# Altium PCB PX4FMUv2.4.6.PcbDoc (part 1 of 3)
Units mil, origin at the board's own origin, x right, y up, seen from the top; angles counter-clockwise.
Board outline 2756 x 1595 mil, 6 copper layers (Top, Ground, Horizontal, Vertical, Power, Bottom), stack 65.355 mil thick; 292 components, 264 nets, 1164 pads, 473 vias.
Unrouted connection lines stored in the file: 12.
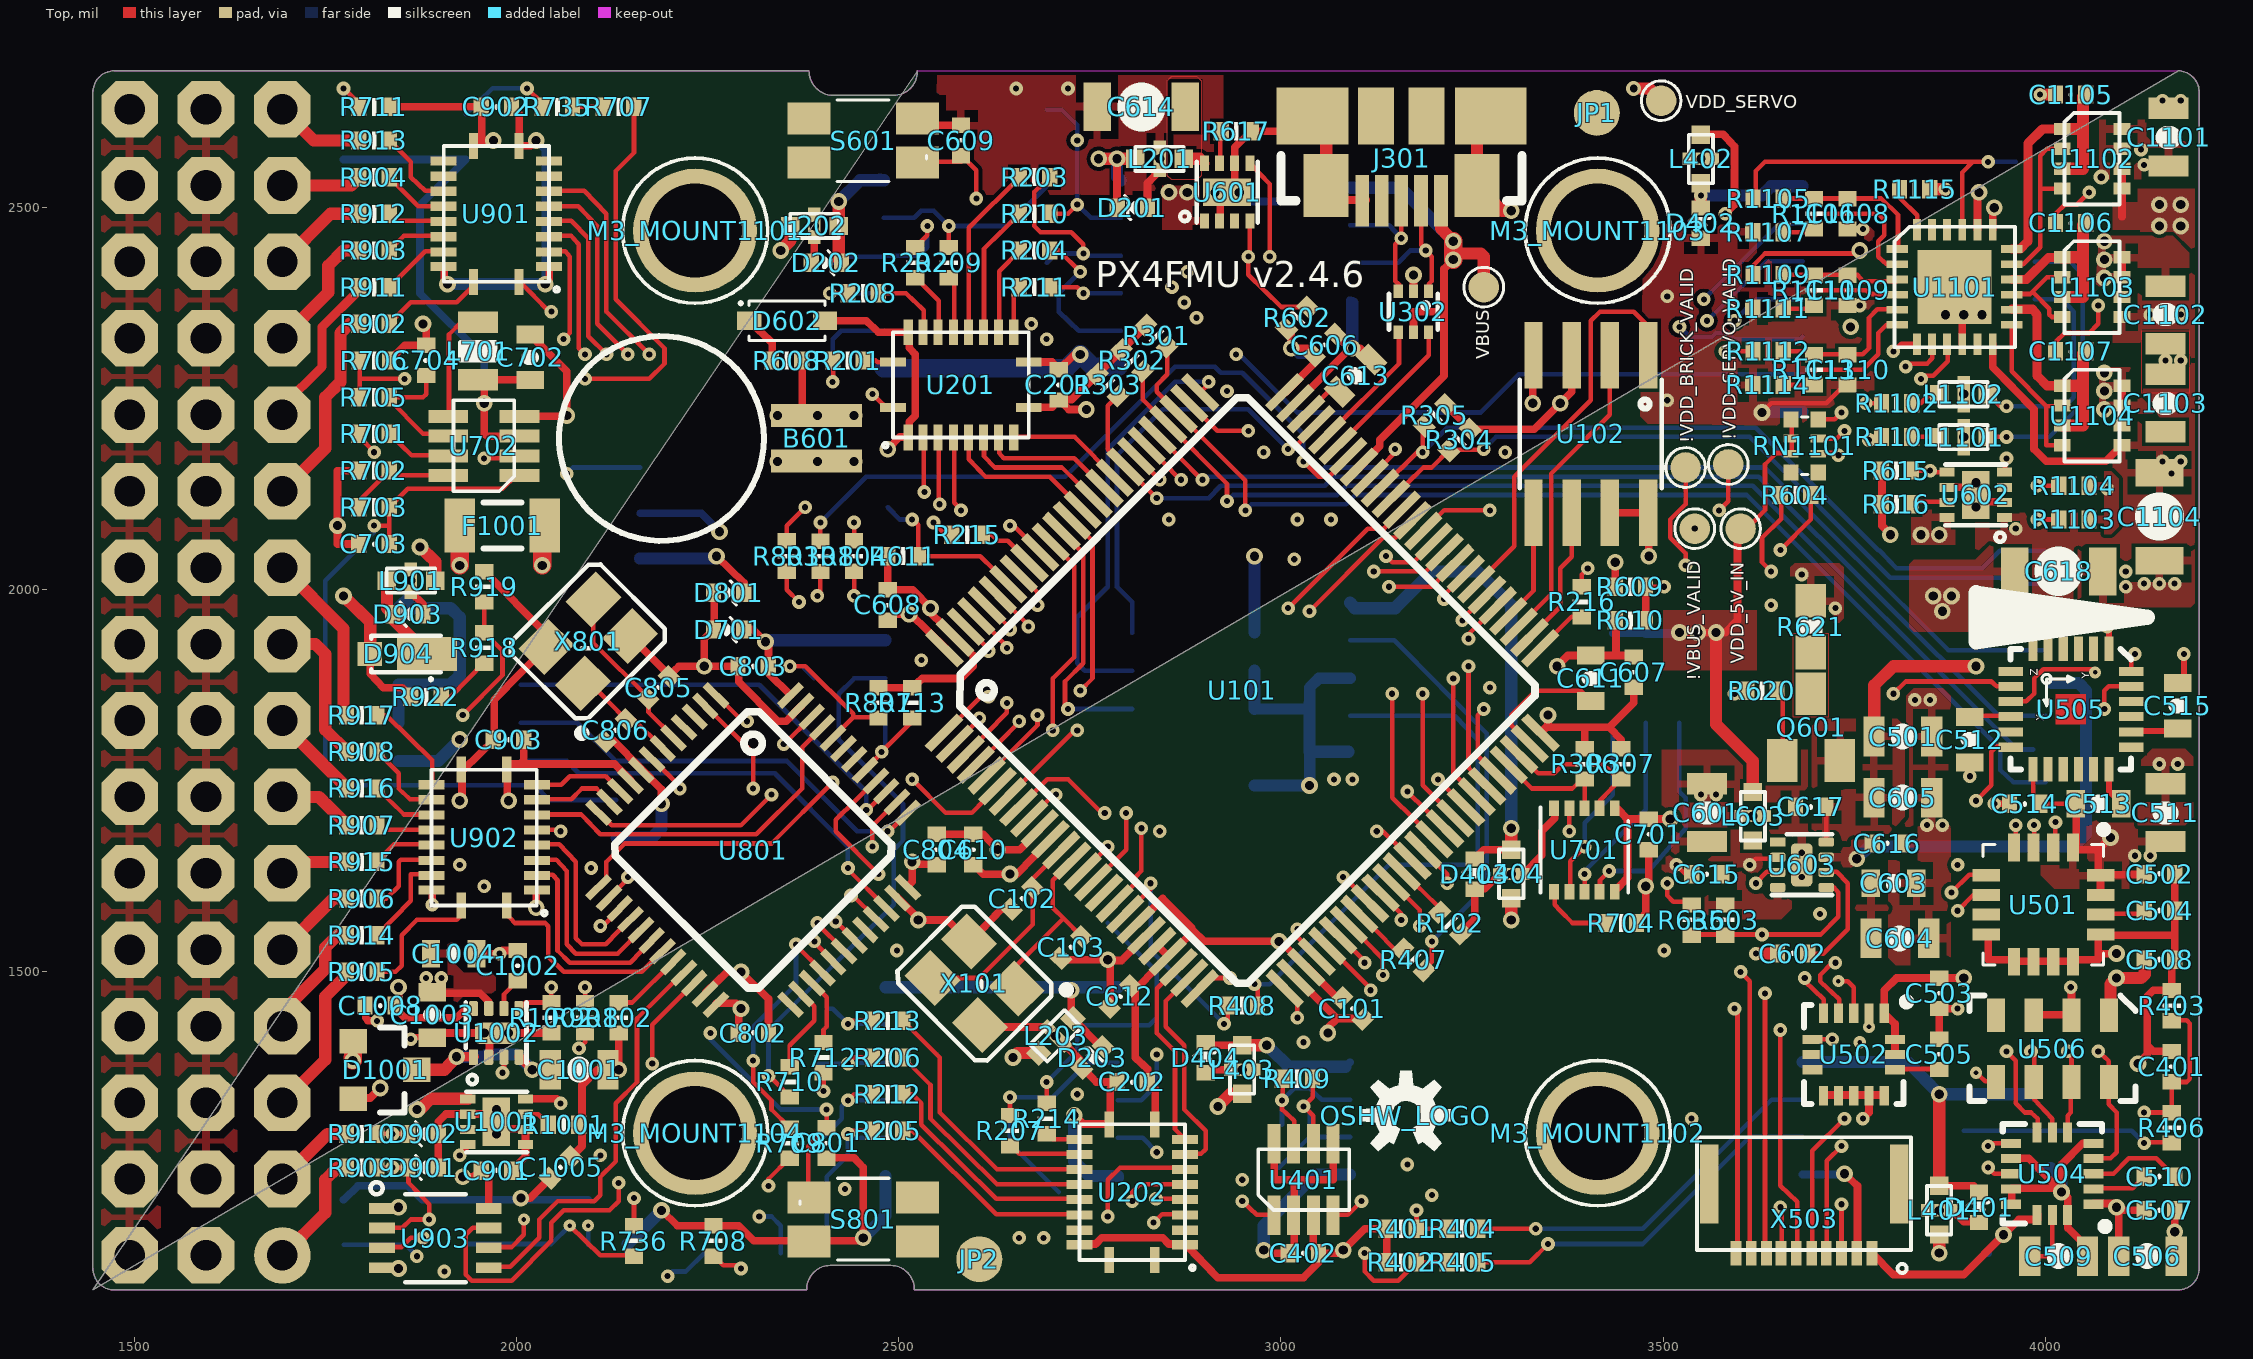
[diagram p0: Top view]
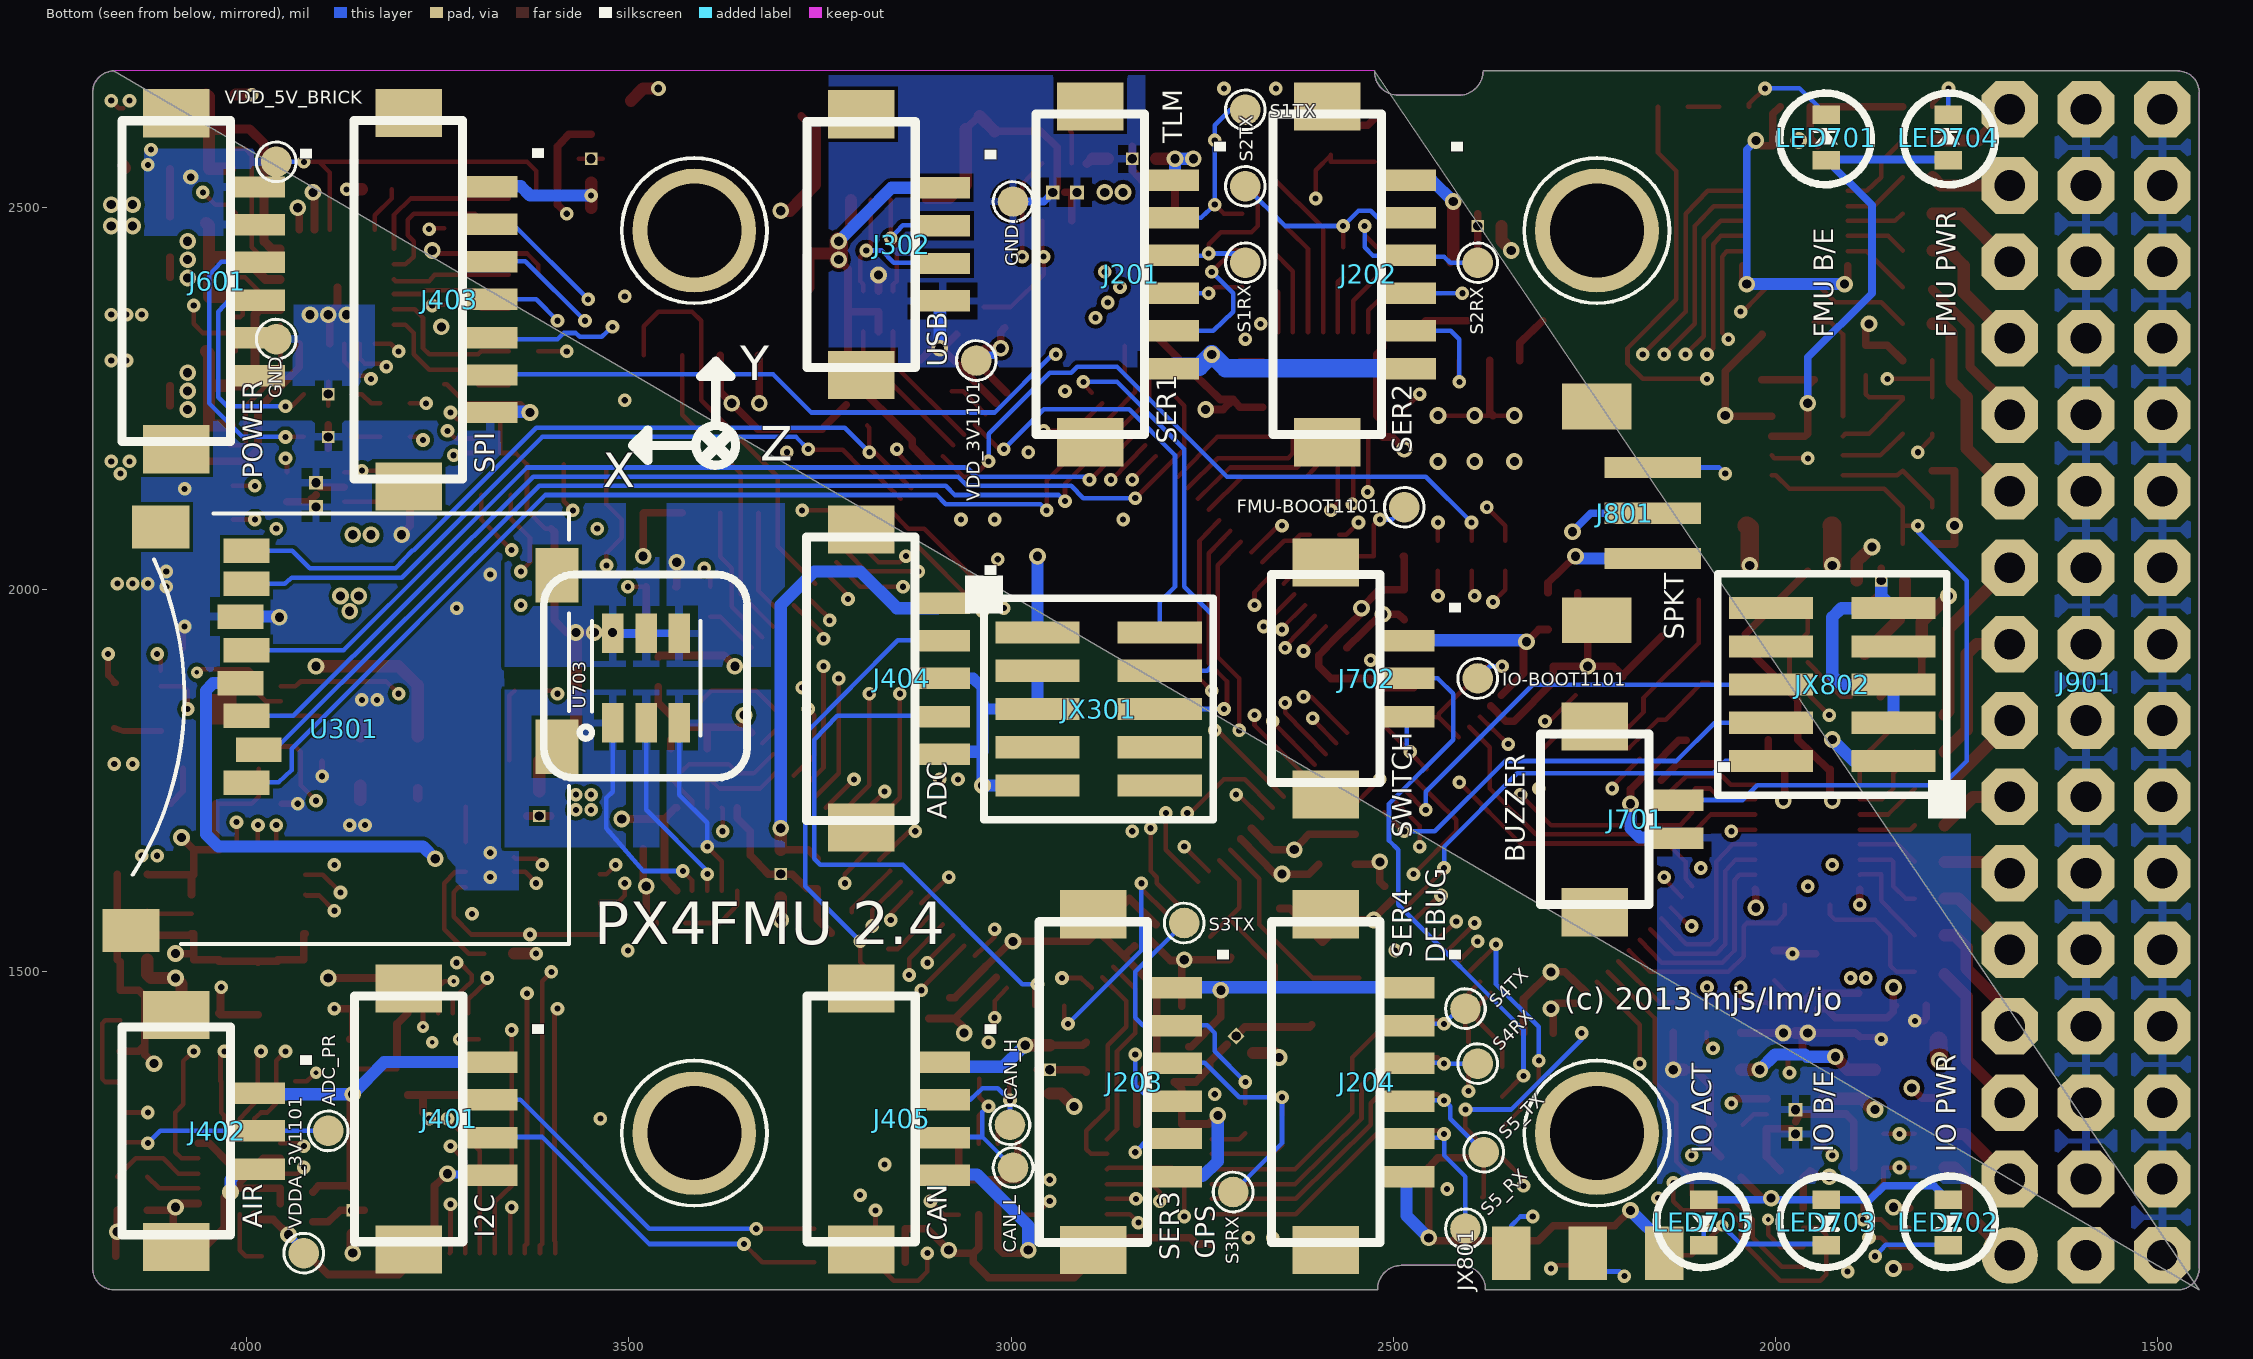
[diagram p1: Bottom view, seen from below]
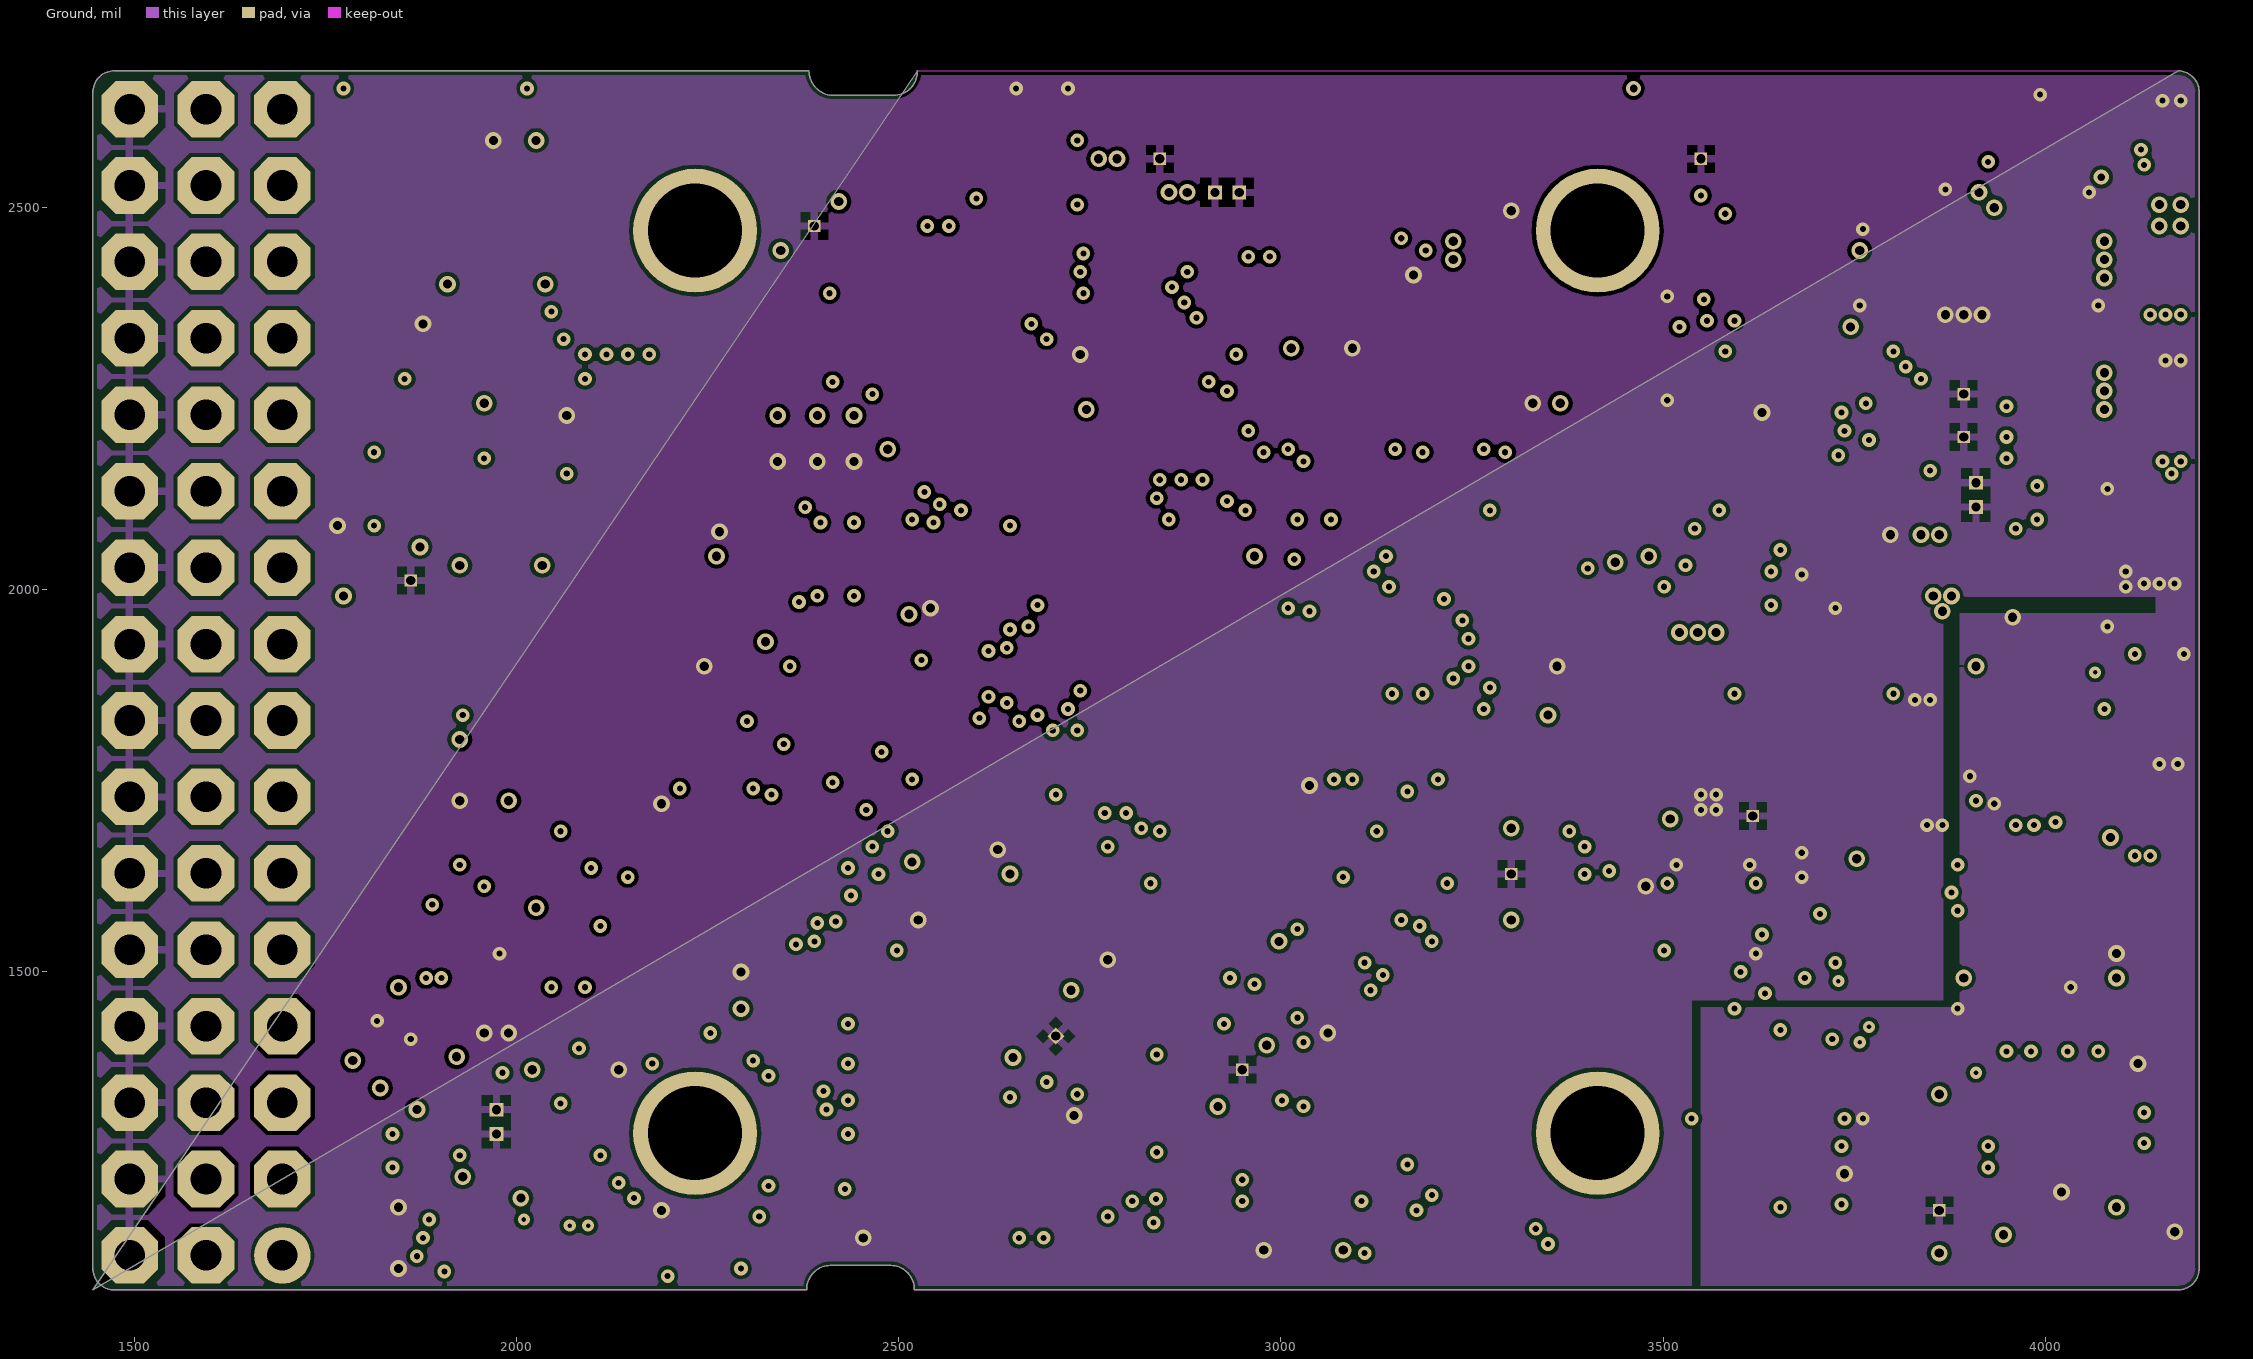
[diagram p2: Ground]
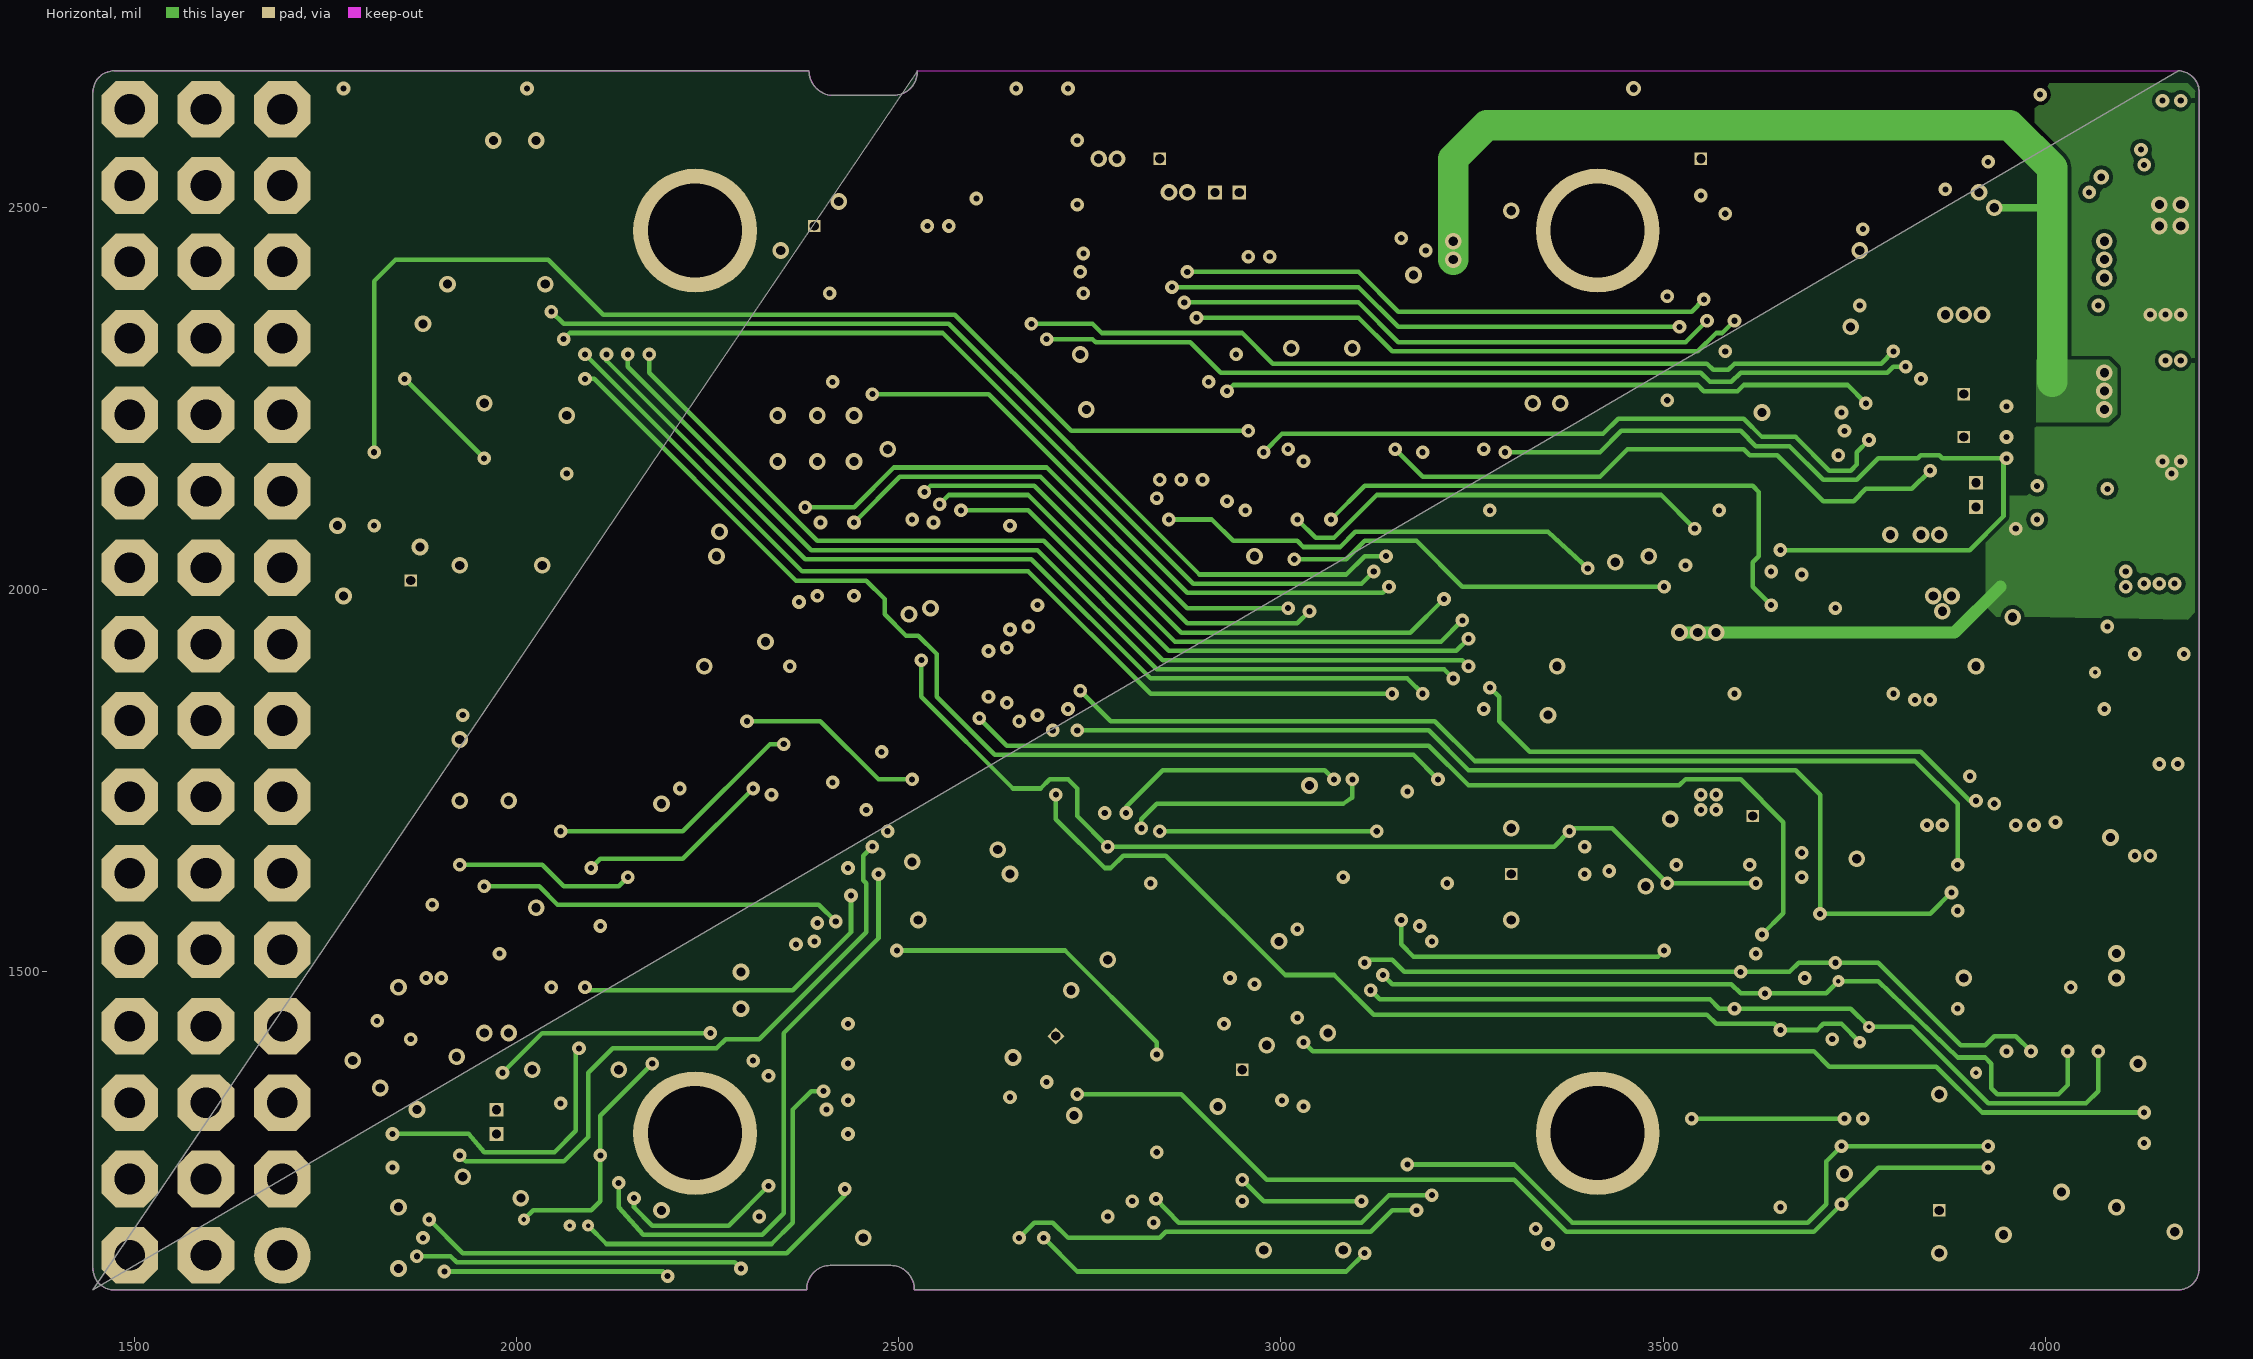
[diagram p3: Horizontal]
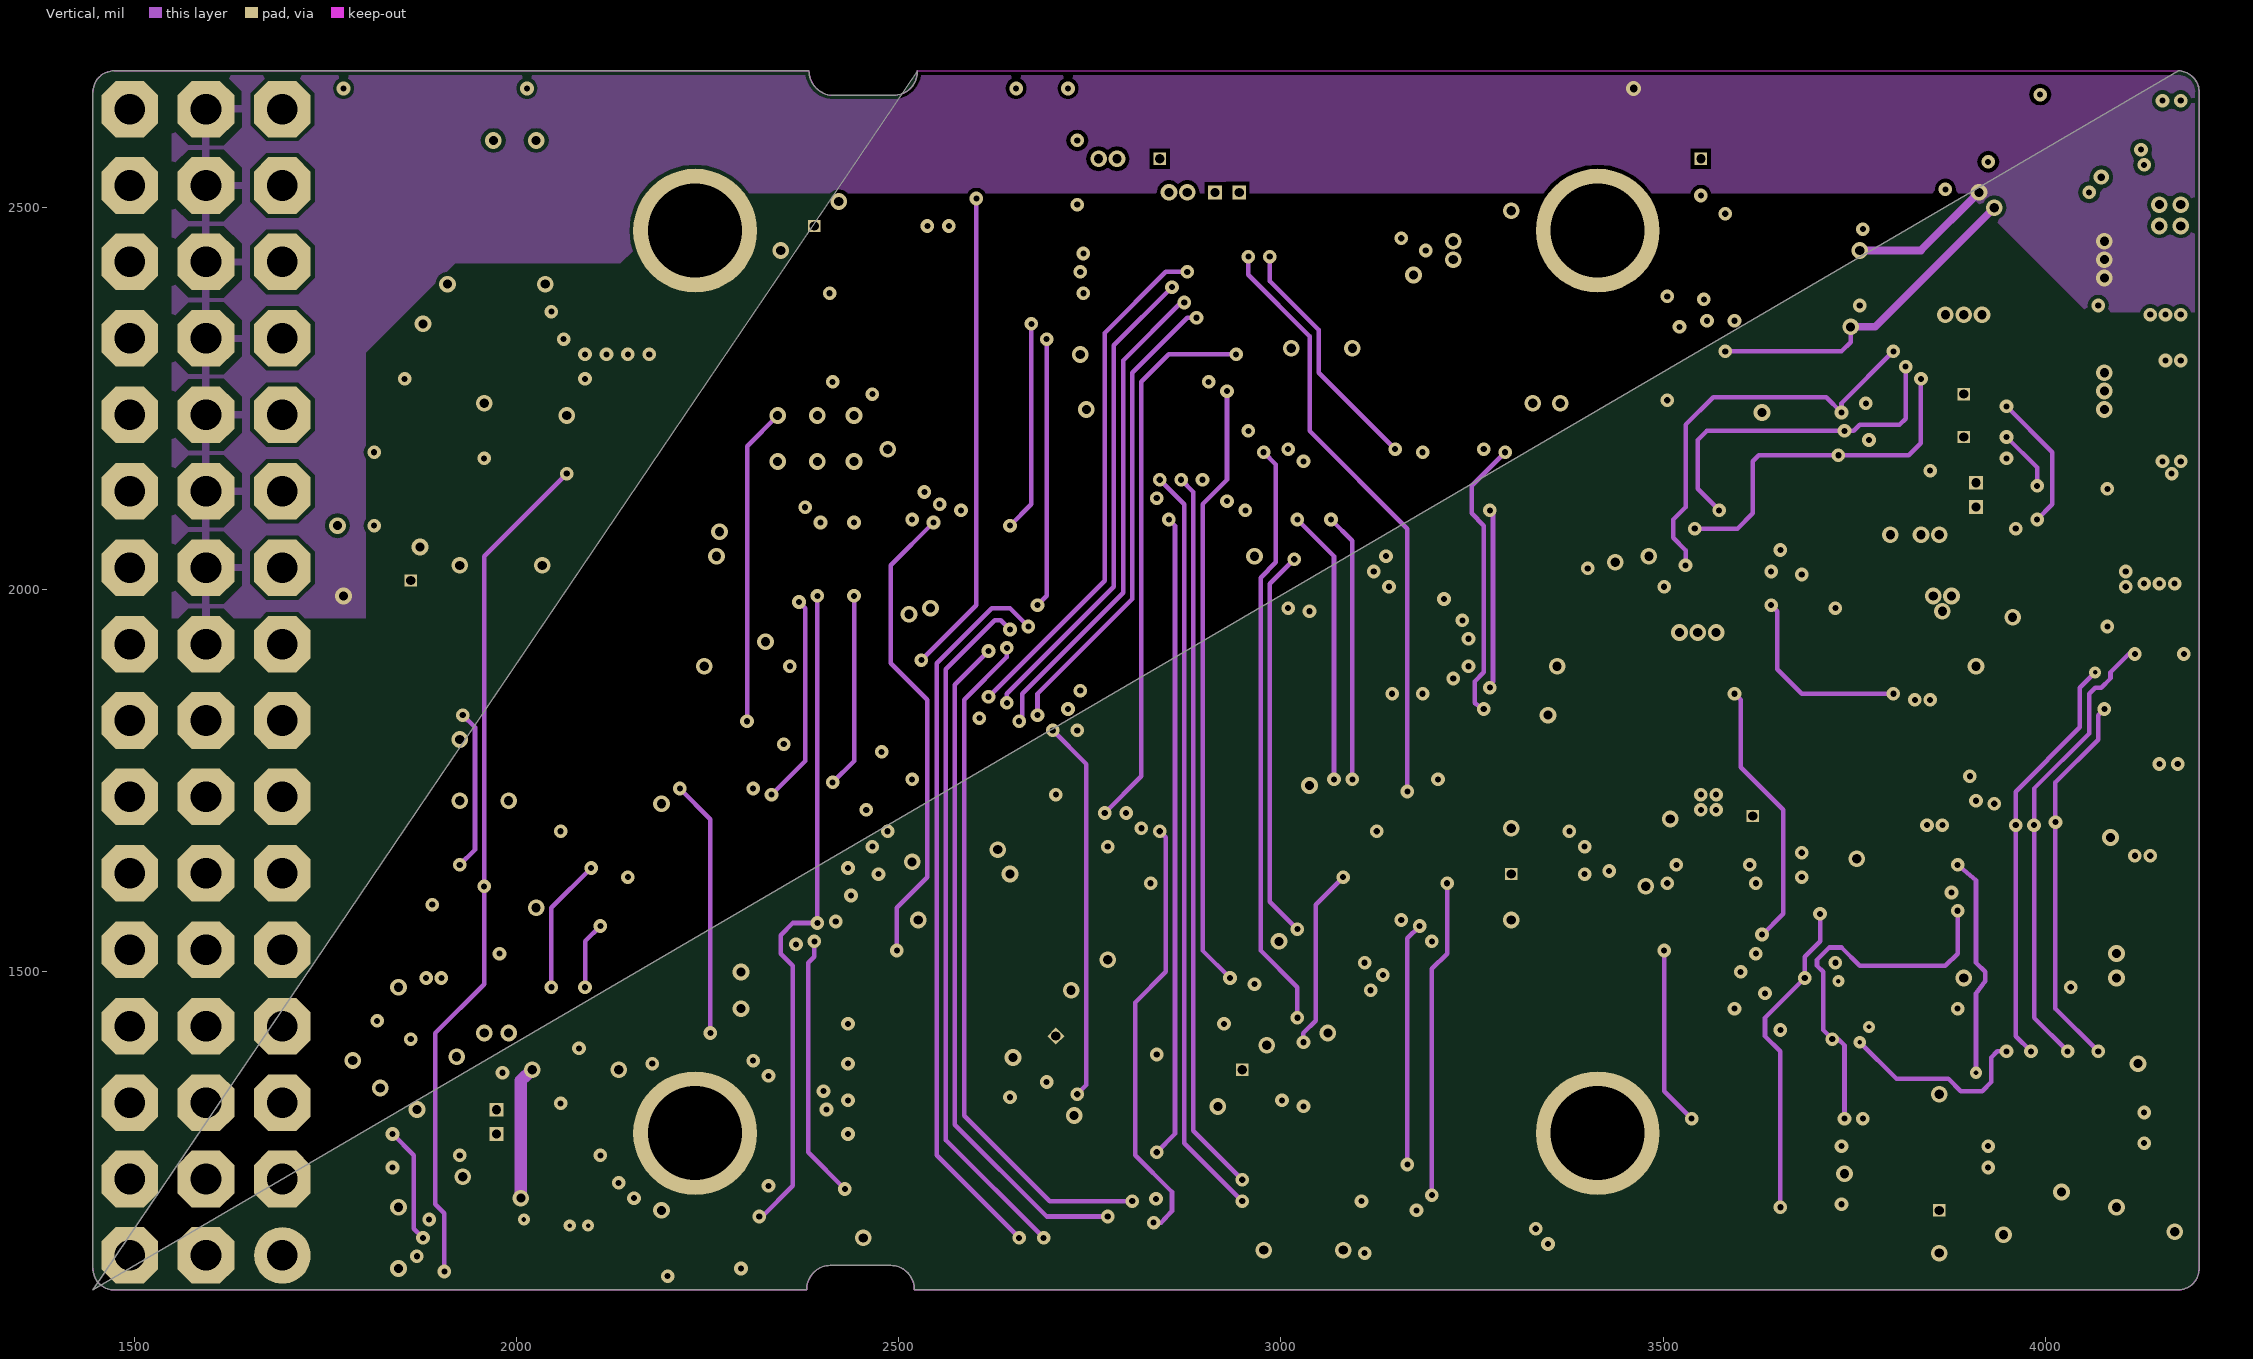
[diagram p4: Vertical]
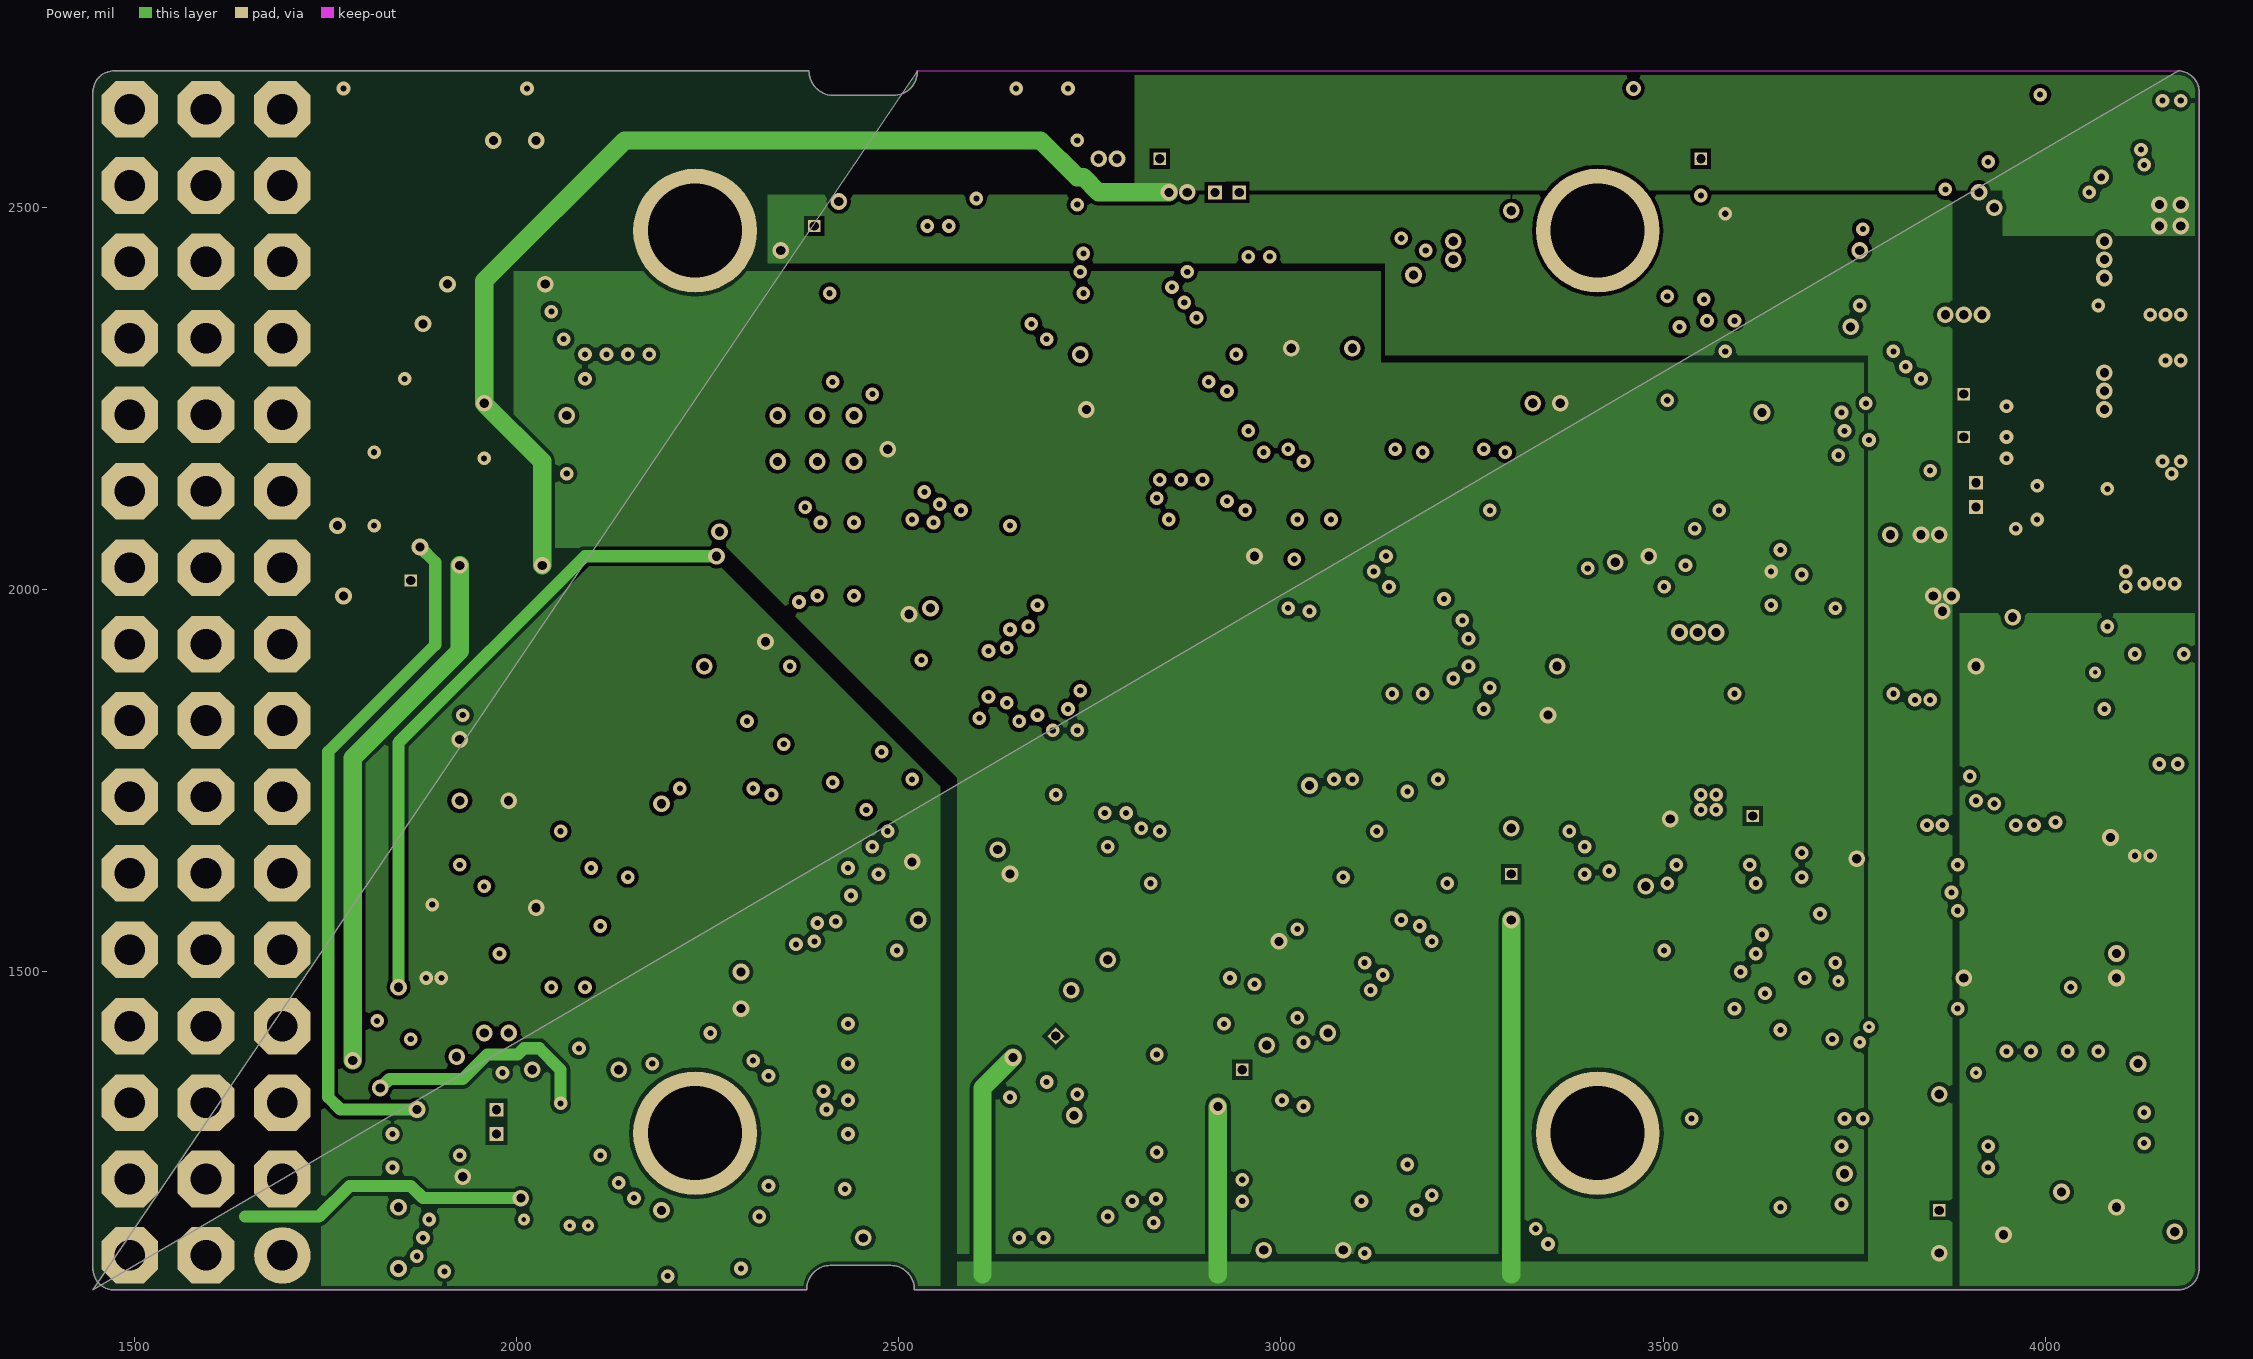
[diagram p5: Power]

## Layer stack, top to bottom
Top Solder: solder mask 0.4, Solder Resist, Dk 3.5
Top: signal copper 1.378
Dielectric 1: core 19.685, FR-4, Dk 4.8
Ground: signal copper 1.378
Dielectric 2: core 19.685, FR-4, Dk 4.8
Horizontal: signal copper 1.378
Dielectric 3: core 5.9055, FR-4, Dk 4.8
Vertical: signal copper 1.378
Dielectric 4: core 5.9055, FR-4, Dk 4.8
Power: signal copper 1.378
Dielectric 5: core 5.9055, FR-4, Dk 4.8
Bottom: signal copper 1.378
Bottom Solder: solder mask 0.4, Solder Resist, Dk 3.5

## Board outline
4174.4,2678.37 cw(c4173.9,2650.87) 4201.4,2650.37 4201.4,1111.37 cw(c4173.9,1110.87) 4174.4,1083.37 2520.4,1083.37 ccw(c2488.9,1083.87) 2489.4,1115.37 2410.4,1115.37 ccw(c2410.9,1083.87) 2379.4,1083.37 1473.4,1083.37 cw(c1473.4,1111.37) 1445.4,1111.37 1445.4,2650.37 cw(c1473.4,2650.37) 1473.4,2678.37 2382.4,2678.37 ccw(c2414.4,2678.37) 2414.4,2646.37 2493.4,2646.37 ccw(c2492.9,2677.87) 2524.4,2678.37 1445.4,1083.37

## Design rules (kind name [scope] priority, off if disabled: settings)
Clearance mdViaVia [IsVia vs IsVia] p1: gap=5
Clearance mdPadVia [IsPad vs IsVia] p2: gap=5
Clearance mdPadPad [IsPad vs IsPad] p3: gap=5
Clearance mdWireVia [(InLayerClass('Signal Layers') AND IsTrack) vs IsVia] p4: gap=5
Clearance mdWirePad [(InLayerClass('Signal Layers') AND IsTrack) vs IsPad] p5: gap=5
Clearance mdWireWire [(InLayerClass('Signal Layers') AND IsTrack) vs (InLayerClass('Signal Layers') AND IsTrack)] p6: gap=5
Clearance [All] p7: gap=5
HoleSize [All] p1: absolutevalues=TRUE maxlimit=100000 minlimit=7.87 maxpercent=80.000 minpercent=20.000
HoleToHoleClearance [All] p1: gap=8 allowstackedmicrovias=TRUE
PasteMaskExpansion [All] p1: expansion=1
PolygonConnect ThermalVias [IsVia] p1: connectstyle=Direct reliefconductorwidth=10 reliefentries=4 polygonreliefangle="90 Angle" airgapwidth=10
PolygonConnect [All] p2: connectstyle=Relief reliefconductorwidth=10 reliefentries=4 polygonreliefangle="90 Angle" airgapwidth=10
RoutingVias [All] p1: holewidth=28 width=50 viastyle="Through Hole" minholewidth=28 minwidth=50 maxholewidth=28 maxwidth=50
SilkToSilkClearance [All] p1 off: silktosilkclearance=10
SilkToSolderMaskClearance [IsPad] p1 off: minsilkscreentomaskgap=10 clearancetoexposedcopper=TRUE
SolderMaskExpansion [All] p1: expansion=1
Width [All] p1: maxlimit=100000 minlimit=5.91 preferedwidth=10
24 further rules are at their usual default settings.

## Components (designator, comment, footprint, x,y, rotation, side; value= is the part's Value field where it differs from the comment)
!VBUS_VALID "" PAD.04X.04 3541.4,2079.37 r270 top
!VDD_BRICK_VALID "" PAD.04X.04 3529.4,2159.37 r90 top
!VDD_SERVO_VALID "" PAD.04X.04 3585.4,2163.37 r90 top
ADC_PR "" PAD.04X.04 3893.4,1291.37 r270 bottom
B601 "MS621FE" MS621FE 2189.4,2197.37 r0 top
C101 "0u1" 0402-CAP 3093.4,1451.37 r315 top
C102 "8p" 0402-CAP 2661.4,1595.37 r225 top
C103 "8p" 0402-CAP 2725.4,1531.37 r45 top
C201 "0u1" 0402-CAP 2709.4,2267.37 r90 top
C202 "0u1" 0402-CAP 2805.4,1355.37 r180 top
C401 "0u1" 0402-CAP 4165.4,1375.37 r90 top
C402 "0u1" 0402-CAP 3029.4,1131.37 r180 top
C501 "10u/10V" 0805-CAP 3813.4,1807.37 r0 top
C502 "0u1" 0402-CAP 4149.4,1627.37 r0 top
C503 "0u1" 0402-CAP 3861.4,1471.37 r270 top
C504 "10n" 0402-CAP 4149.4,1579.37 r0 top
C505 "10n" 0402-CAP 3861.4,1391.37 r90 top
C506 "10u/10V" 0805-CAP 4133.4,1127.37 r0 top
C507 "0u1" 0402-CAP 4149.4,1187.37 r0 top
C508 "0u1" 0402-CAP 4149.4,1515.37 r0 top
C509 "10u/10V" 0805-CAP 4017.4,1127.37 r0 top
C510 "0u47" 0402-CAP 4149.4,1231.37 r0 top
C511 "10u/10V" 0805-CAP 4157.4,1707.37 r90 top
C512 "2u2" 0603-CAP 3901.4,1803.37 r270 top
C513 "2u2" 0603-CAP 4069.4,1719.37 r0 top
C514 "0u1" 0402-CAP 3973.4,1719.37 r180 top
C515 "0u01" 0603-CAP 4173.4,1847.37 r90 top
C601 "10u/25V" 0805-CAP 3557.4,1707.37 r90 top
C602 "10n" 0402-CAP 3669.4,1523.37 r0 top
C603 "1u" 0603-CAP 3801.4,1615.37 r0 top
C604 "22u/25V" 0805-CAP 3809.4,1543.37 r0 top
C605 "22u/25V" 0805-CAP 3813.4,1727.37 r0 top
C606 "0u1" 0402-CAP 3057.4,2319.37 r45 top
C607 "0u1" 0402-CAP 3461.4,1891.37 r90 top
C608 "0u1" 0402-CAP 2485.4,1979.37 r90 top
C609 "0u1" 0402-CAP 2581.4,2587.37 r270 top
C610 "0u1" 0402-CAP 2597.4,1659.37 r90 top
C611 "2u2" 0603-CAP 3405.4,1883.37 r90 top
C612 "0u1" 0402-CAP 2789.4,1467.37 r225 top
C613 "2u2" 0603-CAP 3097.4,2279.37 r45 top
C614 "100u" 1206-CAP 2817.4,2631.37 r180 top
C615 "0u1" 0402-CAP 3557.4,1627.37 r180 top
C616 "0u1" 0402-CAP 3793.4,1667.37 r0 top
C617 "0u1" 0402-CAP 3693.4,1715.37 r180 top
C618 "100u" 1206-CAP 4017.4,2023.37 r0 top
C701 "0u1" 0402-CAP 3481.4,1679.37 r270 top
C702 "1u" 0603-CAP 2017.4,2303.37 r90 top
C703 "5n6" 0402-CAP 1813.4,2059.37 r180 top
C704 "0u47" 0402-CAP 1881.4,2299.37 r90 top
C801 "0u1" 0402-CAP 2405.4,1275.37 r90 top
C802 "0u1" 0402-CAP 2309.4,1419.37 r0 top
C803 "0u1" 0402-CAP 2309.4,1899.37 r180 top
C804 "0u1" 0402-CAP 2549.4,1659.37 r90 top
C805 "8p" 0402-CAP 2185.4,1871.37 r45 top
C806 "8p" 0402-CAP 2129.4,1815.37 r45 top
C901 "0u1" 0402-CAP 1973.4,1239.37 r0 top
C902 "0u1" 0402-CAP 1973.4,2631.37 r180 top
C903 "0u1" 0402-CAP 1989.4,1803.37 r180 top
C1001 "10u/25V" 0805-CAP 2081.4,1371.37 r0 top
C1002 "10n" 0402-CAP 2001.4,1507.37 r90 top
C1003 "1u" 0603-CAP 1889.4,1443.37 r270 top
C1004 "10u" 0603-CAP 1917.4,1523.37 r0 top
C1005 "0u1" 0402-CAP 2057.4,1243.37 r45 top
C1008 "2u2" 0402-CAP 1821.4,1455.37 r180 top
C1101 "22u/25V" 0805-CAP 4161.4,2591.37 r90 top
C1102 "22u/25V" 0805-CAP 4157.4,2359.37 r270 top
C1103 "22u/25V" 0805-CAP 4157.4,2243.37 r90 top
C1104 "100u" 1206-CAP 4149.4,2095.37 r270 top
C1105 "0u1" 0402-CAP 4033.4,2647.37 r180 top
C1106 "0u1" 0402-CAP 4033.4,2479.37 r180 top
C1107 "0u1" 0402-CAP 4033.4,2311.37 r180 top
C1108 "10p/25V" 0402-CAP 3741.4,2491.37 r270 top
C1109 "10p/25V" 0402-CAP 3741.4,2391.37 r270 top
C1110 "1000p/25V" 0402-CAP 3741.4,2287.37 r270 top
CAN_H "" PAD.04X.04 3001.4,1299.37 r90 bottom
CAN_L "" PAD.04X.04 2997.4,1243.37 r270 bottom
D201 "PESD0402-140" 0402-TVS 2805.4,2499.37 r0 top
D202 "PESD0402-140" 0402-TVS 2405.4,2427.37 r180 top
D203 "PESD0402-140" 0402-TVS 2753.4,1387.37 r225 top
D401 "PESD0402-140" 0402-TVS 3913.4,1191.37 r270 top
D402 "PESD0402-140" 0402-TVS 3549.4,2479.37 r270 top
D403 "PESD0402-140" 0402-TVS 3253.4,1627.37 r270 top
D404 "PESD0402-140" 0402-TVS 2901.4,1387.37 r270 top
D602 "RB751V40T1G" SOD323 2353.4,2351.37 r0 top
D701 "PESD0402-140" 0402-TVS 2277.4,1947.37 r180 top
D801 "PESD0402-140" 0402-TVS 2277.4,1995.37 r180 top
D901 "PESD0402-140" 0402-TVS 1877.4,1243.37 r0 top
D902 "PESD0402-140" 0402-TVS 1877.4,1287.37 r0 top
D903 "PESD0402-140" 0402-TVS 1857.4,1967.37 r0 top
D904 "MSS1P4-M3" MICROSMP 1833.4,1915.37 r180 top
D1001 "PMEG2005CT" SOT23-3 1825.4,1371.37 r270 top
F1001 "0ZCA0035FF2G" PTC-1206 1981.4,2083.37 r180 top
FMU-BOOT1101 "" PAD.04X.04 2485.4,2107.37 r180 bottom
GND "" PAD.04X.04 3961.4,2327.37 r270 bottom
GND. "" PAD.04X.04 2997.4,2507.37 r180 bottom
IO-BOOT1101 "" PAD.04X.04 2389.4,1883.37 r180 bottom
J201 "" DF13C-6P-1.25V 2825.4,2412.37 r270 bottom
J202 "" DF13C-6P-1.25V 2515.4,2412.37 r270 bottom
J203 "" DF13C-6P-1.25V 2821.4,1355.37 r270 bottom
J204 "" DF13C-6P-1.25V 2517.4,1355.37 r270 bottom
J301 "47346-0001" MOLEX-47346-0001 3157.4,2619.37 r270 top
J302 "" DF13C-4P-1.25V 3125.4,2451.37 r270 bottom
J401 "" DF13C-4P-1.25V 3717.4,1307.37 r270 bottom
J402 "" DF13C-3P-1.25V 4021.4,1291.37 r270 bottom
J403 "" DF13C-7P-1.25V 3717.4,2379.37 r270 bottom
J404 "" DF13C-5P-1.25V 3125.4,1883.37 r270 bottom
J405 "" DF13C-4P-1.25V 3125.4,1307.37 r270 bottom
J601 "" DF13C-6P-1.25V 4021.4,2403.37 r270 bottom
J701 "" DF13C-2P-1.25V 2165.4,1699.37 r270 bottom
J702 "" DF13C-3P-1.25V 2517.4,1883.37 r270 bottom
J801 "" JST-ZH-SMT-VERTICAL 2229.4,2099.37 r90 bottom
J901 "" 3X16RA 1593.4,1878.37 r0 bottom
JP1 "" FIDUCIAL-1.5X3 3413.4,2623.37 r0 top
JP2 "" FIDUCIAL-1.5X3 2605.4,1123.37 r0 top
JX301 "ARM_MINI_JTAG-SMT" FTSH-105-01-XXX-DV-K 2885.4,1843.37 r270 bottom
JX801 "" HEADER_3X01_SMD_H_BOARD_EDGE_SHORT 2245.4,1131.37 r180 bottom
JX802 "ARM_MINI_JTAG-SMT" FTSH-105-01-XXX-DV-K 1925.4,1875.37 r90 bottom
L201 "" KYOCERA-KNH16-DA 2841.4,2563.37 r180 top
L202 "" KYOCERA-KNH16-DA 2389.4,2475.37 r0 top
L203 "" KYOCERA-KNH16-DA 2705.4,1415.37 r45 top
L401 "" KYOCERA-KNH16-DA 3861.4,1187.37 r90 top
L402 "" KYOCERA-KNH16-DA 3549.4,2563.37 r270 top
L403 "" KYOCERA-KNH16-DA 2949.4,1371.37 r90 top
L404 "" KYOCERA-KNH16-DA 3301.4,1627.37 r90 top
L603 "" KYOCERA-KNH16-DA 3617.4,1703.37 r270 top
L701 "47uH" 0805-IND 1949.4,2311.37 r90 top
L901 "" KYOCERA-KNH16-DA 1861.4,2011.37 r0 top
L1101 "" KYOCERA-KNH16-DA 3893.4,2199.37 r180 top
L1102 "" KYOCERA-KNH16-DA 3893.4,2255.37 r180 top
LED701 "AMBER" 0603-LED 1933.4,2591.37 r270 bottom
LED702 "GREEN" 0603-LED 1773.4,1171.37 r90 bottom
LED703 "AMBER" 0603-LED 1933.4,1171.37 r90 bottom
LED704 "GREEN" 0603-LED 1773.4,2591.37 r270 bottom
LED705 "BLUE" 0603-LED 2093.4,1171.37 r90 bottom
M3_MOUNT1101 "" MOUNT-HOLE3.1 2233.4,2469.37 r0 top
M3_MOUNT1102 "" MOUNT-HOLE3.1 3414.4,1288.37 r0 top
M3_MOUNT1103 "" MOUNT-HOLE3.1 3414.4,2469.37 r0 top
M3_MOUNT1104 "" MOUNT-HOLE3.1 2233.4,1288.37 r0 top
OSHW_LOGO "" OSHW-LOGO-S 3163.4,1311.37 r0 top
Q601 "MMBT3906LT1SMD" SOT23-BEC 3693.4,1819.37 r0 top
R101 "470R" 0402-RES 2397.4,2043.37 r270 top
R102 "10K" 0402-RES 3221.4,1563.37 r315 top
R201 "120R" 0402-RES 2433.4,2299.37 r180 top
R202 "120R" 0402-RES 2521.4,2427.37 r90 top
R203 "120R" 0402-RES 2677.4,2539.37 r0 top
R204 "120R" 0402-RES 2677.4,2443.37 r0 top
R205 "120R" 0402-RES 2485.4,1291.37 r180 top
R206 "120R" 0402-RES 2485.4,1387.37 r180 top
R207 "120R" 0402-RES 2645.4,1291.37 r90 top
R208 "120R" 0402-RES 2453.4,2387.37 r180 top
R209 "120R" 0402-RES 2565.4,2427.37 r90 top
R210 "120R" 0402-RES 2677.4,2491.37 r0 top
R211 "120R" 0402-RES 2677.4,2395.37 r0 top
R212 "120R" 0402-RES 2485.4,1339.37 r180 top
R213 "120R" 0402-RES 2485.4,1435.37 r180 top
R214 "120R" 0402-RES 2693.4,1307.37 r90 top
R215 "120R" 0402-RES 2589.4,2071.37 r180 top
R216 "120R" 0402-RES 3393.4,1983.37 r90 top
R301 "100K" 0402-RES 2837.4,2331.37 r135 top
R302 "100K" 0402-RES 2805.4,2299.37 r135 top
R303 "100K" 0402-RES 2773.4,2267.37 r135 top
R304 "100K" 0402-RES 3233.4,2195.37 r45 top
R305 "100K" 0402-RES 3201.4,2227.37 r45 top
R306 "1K5" 0402-RES 3397.4,1771.37 r90 top
R307 "1K5" 0402-RES 3445.4,1771.37 r90 top
R401 "1K5" 0402-RES 3157.4,1163.37 r180 top
R402 "1K5" 0402-RES 3157.4,1119.37 r180 top
R403 "10K/0.1%" 0402-RES 4165.4,1455.37 r270 top
R404 "120R" 0402-RES 3237.4,1163.37 r0 top
R405 "120R" 0402-RES 3237.4,1119.37 r0 top
R406 "10K/0.1%" 0402-RES 4165.4,1295.37 r270 top
R407 "10K/0.1%" 0402-RES 3173.4,1515.37 r315 top
R408 "10K/0.1%" 0402-RES 2949.4,1455.37 r0 top
R409 "120R" 0402-RES 3021.4,1359.37 r0 top
R602 "1M" 0402-RES 3021.4,2355.37 r225 top
R603 "10K" 0402-RES 3581.4,1567.37 r270 top
R604 "1M" 0402-RES 3673.4,2123.37 r180 top
R608 "1K" 0402-RES 2353.4,2299.37 r180 top
R609 "10K/0.1%" 0402-RES 3457.4,2003.37 r180 top
R610 "10K/0.1%" 0402-RES 3457.4,1959.37 r180 top
R611 "10K" 0402-RES 2505.4,2043.37 r0 top
R615 "10K" 0402-RES 3805.4,2155.37 r180 top
R616 "25K5" 0402-RES 3805.4,2111.37 r180 top
R617 "16K5" 0402-RES 2941.4,2599.37 r0 top
R620 "1K8" 0402-RES 3629.4,1867.37 r180 top
R621 "10R" 0603-RES 3693.4,1951.37 r270 top
R635 "10K" 0402-RES 3537.4,1567.37 r270 top
R701 "9K09" 0402-RES 1813.4,2203.37 r180 top
R702 "10K" 0402-RES 1813.4,2155.37 r180 top
R703 "100K" 0402-RES 1813.4,2107.37 r180 top
R704 "10K" 0402-RES 3445.4,1563.37 r180 top
R705 "453K" 0402-RES 1813.4,2251.37 r180 top
R706 "16K5" 0402-RES 1813.4,2299.37 r0 top
R707 "220R" 0402-RES 2133.4,2631.37 r180 top
R708 "220R" 0402-RES 2257.4,1147.37 r270 top
R709 "220R" 0402-RES 2357.4,1275.37 r270 top
R710 "68R" 0402-RES 2357.4,1355.37 r90 top
R711 "220R" 0402-RES 1813.4,2631.37 r180 top
R712 "220R" 0402-RES 2401.4,1387.37 r270 top
R713 "1K5" 0402-RES 2517.4,1851.37 r90 top
R735 "220R" 0402-RES 2053.4,2631.37 r180 top
R736 "220R" 0402-RES 2153.4,1147.37 r270 top
R801 "10K" 0402-RES 2473.4,1851.37 r90 top
R802 "10K" 0402-RES 2133.4,1439.37 r270 top
R803 "220R" 0402-RES 2353.4,2043.37 r90 top
R804 "220R" 0402-RES 2441.4,2043.37 r90 top
R901 "10K" 0402-RES 2089.4,1439.37 r270 top
R902 "220R" 0402-RES 1813.4,2347.37 r180 top
R903 "220R" 0402-RES 1813.4,2443.37 r180 top
R904 "220R" 0402-RES 1813.4,2539.37 r180 top
R905 "220R" 0402-RES 1797.4,1499.37 r180 top
R906 "220R" 0402-RES 1797.4,1595.37 r180 top
R907 "220R" 0402-RES 1797.4,1691.37 r180 top
R908 "220R" 0402-RES 1797.4,1787.37 r180 top
R909 "220R" 0402-RES 1797.4,1243.37 r180 top
R910 "220R" 0402-RES 1797.4,1287.37 r180 top
R911 "220R" 0402-RES 1813.4,2395.37 r180 top
R912 "220R" 0402-RES 1813.4,2491.37 r180 top
R913 "220R" 0402-RES 1813.4,2587.37 r180 top
R914 "220R" 0402-RES 1797.4,1547.37 r180 top
R915 "220R" 0402-RES 1797.4,1643.37 r180 top
R916 "220R" 0402-RES 1797.4,1739.37 r180 top
R917 "220R" 0402-RES 1797.4,1835.37 r180 top
R918 "10K/0.1%" 0402-RES 1957.4,1923.37 r270 top
R919 "10K/0.1%" 0402-RES 1957.4,2003.37 r270 top
R922 "10K/0.1%" 0402-RES 1881.4,1859.37 r180 top
R1001 "100K" 0402-RES 2061.4,1299.37 r180 top
R1002 "10K" 0402-RES 2045.4,1439.37 r90 top
R1101 "10K/0.1%" 0402-RES 3805.4,2199.37 r0 top
R1102 "10K/0.1%" 0402-RES 3805.4,2243.37 r0 top
R1103 "1M" 0402-RES 4037.4,2091.37 r0 top
R1104 "1M" 0402-RES 4037.4,2135.37 r0 top
R1105 "453K" 0402-RES 3637.4,2511.37 r0 top
R1106 "56K" 0402-RES 3697.4,2491.37 r270 top
R1107 "105K" 0402-RES 3637.4,2467.37 r180 top
R1109 "453K" 0402-RES 3637.4,2411.37 r0 top
R1110 "56K" 0402-RES 3697.4,2391.37 r270 top
R1111 "105K" 0402-RES 3637.4,2367.37 r180 top
R1112 "453K" 0402-RES 3637.4,2311.37 r0 top
R1113 "56K" 0402-RES 3697.4,2287.37 r270 top
R1114 "105K" 0402-RES 3637.4,2267.37 r180 top
R1115 "0R" 0402-RES 3829.4,2523.37 r180 top
RN1101 "1M" EXB28V 3685.4,2187.37 r90 top
S1RX "" PAD.04X.04 2693.4,2427.37 r270 bottom
S1TX "" PAD.04X.04 2693.4,2627.37 r180 bottom
S2RX "" PAD.04X.04 2389.4,2427.37 r270 bottom
S2TX "" PAD.04X.04 2693.4,2527.37 r90 bottom
S3RX "" PAD.04X.04 2709.4,1211.37 r270 bottom
S3TX "" PAD.04X.04 2773.4,1563.37 r180 bottom
S4RX "" PAD.04X.04 2389.4,1379.37 r135 bottom
S4TX "" PAD.04X.04 2405.4,1451.37 r135 bottom
S5_RX "" PAD.04X.04 2405.4,1163.37 r135 bottom
S5_TX "" PAD.04X.04 2381.4,1263.37 r135 bottom
S601 "RESET" EVQP7J01K 2453.4,2587.37 r180 top
S801 "RESET" EVQP7J01K 2453.4,1175.37 r0 top
U101 "STM32F4X7VX" TQFP100 2949.4,1867.37 r45 top
U102 "FM25V01" SO08 3405.4,2203.37 r180 top
U201 "" QFN20-RGY 2581.4,2267.37 r90 top
U202 "" QFN20-RGY 2805.4,1211.37 r180 top
U301 "" MICROSD 3893.4,1823.37 r90 bottom
U302 "NUF2042XV6" SOT563-6 3173.4,2363.37 r180 top
U401 "MAX3051" SOT23-8 3029.4,1227.37 r0 top
U501 "L3GD20" L3G4200DH-MAN 3997.4,1587.37 r270 top
U502 "L3GD20H" LGA-16L 3749.4,1391.37 r270 top
U504 "LSM303D" LGA-16L 4009.4,1235.37 r180 top
U505 "MPU-6000" QFN-24 4033.4,1843.37 r270 top
U506 "MS5611-01BA" MS5611-01BA 4009.4,1399.37 r270 top
U601 "" QFN8-DSG 2929.4,2519.37 r0 top
U602 "" QFN8-DSG 3909.4,2123.37 r90 top
U603 "MIC5332" MLF-8-EPAD 3681.4,1639.37 r0 top
U701 "TCA62724FMG" SON10 3397.4,1659.37 r180 top
U702 "LT3469" SOT23-8 1957.4,2187.37 r90 top
U703 "" 6-PLCC 3477.4,1883.37 r90 bottom
U801 "STM32F10XCXT6" TQFP48 2309.4,1659.37 r225 top
U901 "" QFN20-RGY 1973.4,2491.37 r180 top
U902 "" QFN20-RGY 1957.4,1675.37 r180 top
U903 "74LVC2G240" TSSOP8_SOT505-2 1893.4,1151.37 r270 top
U1001 "" QFN8-DSG 1973.4,1303.37 r270 top
U1002 "MIC5332" MLF-8-EPAD 1973.4,1419.37 r90 top
U1101 "" MO-220 3881.4,2395.37 r0 top
U1102 "" 1206-8 4061.4,2563.37 r270 top
U1103 "" 1206-8 4061.4,2395.37 r270 top
U1104 "" 1206-8 4061.4,2227.37 r270 top
VBUS "" PAD.04X.04 3265.4,2395.37 r270 top
VDD_3V1101 "" PAD.04X.04 3045.4,2299.37 r180 bottom
VDD_5V_BRICK "" PAD.04X.04 3961.4,2559.37 r270 bottom
VDD_5V_IN "" PAD.04X.04 3601.4,2079.37 r270 top
VDD_SERVO "" PAD.04X.04 3497.4,2639.37 r0 top
VDDA_3V1101 "" PAD.04X.04 3925.4,1131.37 r180 bottom
X101 "3.2x2.5 mm / 24 MHz / 15 ppm" OSCILLATOR-3.2X2.5 2599.4,1484.37 r135 top
X503 "" 51281-1094 3773.4,1131.37 r180 top
X801 "3.2x2.5 mm / 24 MHz / 15 ppm" OSCILLATOR-3.2X2.5 2093.4,1931.37 r45 top

## Footprints (in the part's own frame and the unit in brackets; to place one, negate y for a bottom-side part, rotate by r counter-clockwise, add the part's x,y. Pads: shape width x height; smd on the part's side, far side on the other; paste and mask are expansions set on the pad)
3X16RA [mil] "3X16RA"
  round 74 hole 40: 1(100,750)
  oct 74x74 hole 40: 2(0,750) 3(-100,750) 4(100,650) 5(0,650) 6(-100,650) 7(100,550) 8(0,550) 9(-100,550) 10(100,450) 11(0,450) 12(-100,450) 13(100,350) 14(0,350) 15(-100,350) 16(100,250) 17(0,250) 18(-100,250) 19(100,150) 20(0,150) 21(-100,150) 22(100,50) 23(0,50) 24(-100,50) 25(100,-50) 26(0,-50) 27(-100,-50) 28(100,-150) 29(0,-150) 30(-100,-150) 31(100,-250) 32(0,-250) 33(-100,-250) 34(100,-350) 35(0,-350) 36(-100,-350) 37(100,-450) 38(0,-450) 39(-100,-450) 40(100,-550) 41(0,-550) 42(-100,-550) 43(100,-650) 44(0,-650) 45(-100,-650) 46(100,-750) 47(0,-750) 48(-100,-750)
6-PLCC [mil] "6-PLCC"
  rect 52x28 smd: A1(59,44) A2(59,0) A3(59,-43.31) C1(-58.07,44) C2(-58.07,0) C3(-58.07,-43.31)
  silkscreen extent -79,-71 75,87
0402-CAP [mil] "0402-CAP"
  rect 20x24 smd: P$1(-19.69,0) P$2(20,0)
  silkscreen extent 0,0 0,1
0402-RES [mil] "0402-RES"
  rect 20x24 smd: P$1(-19.68,0) P$2(20,0)
  silkscreen extent -3,-12 3,12
0402-TVS [mil] "0402-TVS"
  rect 20x24 smd: A(20,0) C(-19.68,0)
  silkscreen extent -10,-16 3,16
0603-CAP [mil] "0603-CAP"
  rect 24x36 smd: P$1(-29.53,0) P$2(30,0)
  silkscreen extent 0,-2 0,2
0603-LED [mil] "0603-LED"
  rect 24x36 smd: A(30,0) C(-29.53,0)
  silkscreen extent -9,-15 9,15
0603-RES [mil] "0603-RES"
  rect 44x40 smd: 1(-33.46,0) 2(34,0)
  silkscreen extent -9,-15 9,15
0805-CAP [mil] "0805-CAP"
  rect 28x52 smd: P$1(-37.4,0) P$2(38,0)
  silkscreen extent 0,-2 0,2
0805-IND [mil] "0805-IND"
  rect 28x52 smd: P$1(-37.4,0) P$2(38,0)
  silkscreen extent -12,-23 12,23
1206-8 [mil] "1206-8"
  rect 16x22 smd: P$1(-39,-39) P$2(-13,-39) P$3(13,-39) P$4(39,-39) P$5(39,39) P$6(13,39) P$7(-13,39) P$8(-39,39)
  silkscreen extent -60,-36 60,36
1206-CAP [mil] "1206-CAP"
  rect 36x63 smd: P$1(-57.09,0) P$2(58,0)
  silkscreen extent 0,0 0,1
51281-1094 [mil] "51281-1094"
  rect 14x32 smd: 1(0,0) 2(20,0) 3(40,0) 4(60,0) 5(79,0) 6(99,0) 7(119,0) 8(138,0) 9(158,0) 10(178,0)
  rect 24x103 smd: P$11(-35.43,-90.55) P$12(213,-90.55)
  silkscreen extent -51,-152 229,26
DF13C-2P-1.25V [mil] "DF13C-2P-1.25V"
  rect 28x71 smd: 1(-24.61,36) 2(25,36)
  rect 63x87 smd: M$0(122,-70.87) M$1(-121.06,-70.87)
  silkscreen extent -111,-142 112,0
DF13C-3P-1.25V [mil] "DF13C-3P-1.25V"
  rect 28x71 smd: 1(-49.21,36) 2(0,36) 3(50,36)
  rect 63x87 smd: M$0(152,-70.87) M$1(-151.57,-70.87)
  silkscreen extent -136,-142 136,0
DF13C-4P-1.25V [mil] "DF13C-4P-1.25V"
  rect 28x71 smd: 1(-73.82,36) 2(-24.61,36) 3(25,36) 4(74,36)
  rect 63x87 smd: M$0(171,-70.87) M$1(-170.28,-70.87)
  silkscreen extent -160,-142 161,0
DF13C-5P-1.25V [mil] "DF13C-5P-1.25V"
  rect 28x71 smd: 1(-98.43,36) 2(-49.21,36) 3(0,36) 4(50,36) 5(99,36)
  rect 63x87 smd: M$0(195,-70.87) M$1(-194.88,-70.87)
  silkscreen extent -185,-142 186,0
DF13C-6P-1.25V [mil] "DF13C-6P-1.25V"
  rect 28x71 smd: 1(-123.03,36) 2(-73.82,36) 3(-24.61,36) 4(25,36) 5(74,36) 6(124,36)
  rect 63x87 smd: M$0(220,-70.87) M$1(-219.49,-70.87)
  silkscreen extent -210,-142 210,0
DF13C-7P-1.25V [mil] "DF13C-7P-1.25V"
  rect 28x71 smd: 1(-147.64,36) 2(-98.43,36) 3(-49.21,36) 4(0,36) 5(50,36) 6(99,36) 7(148,36)
  rect 63x87 smd: M$0(245,-70.87) M$1(-244.09,-70.87)
  silkscreen extent -234,-142 235,0
EVQP7J01K [mil] "EVQP7J01K"
  rect 56x42 smd: A1(-70.87,29) A2(71,29) B3(-70.87,-28.54) B4(71,-28.54)
  silkscreen extent -83,-53 34,54
EXB28V [mil] "EXB28V"
  rect 21x20 smd: 1(-34.45,-17.72) 4(35,-17.72) 5(35,18) 8(-34.45,18)
  rect 10x20 smd: 2(-9.84,-17.72) 3(10,-17.72) 6(10,18) 7(-9.84,18)
  silkscreen extent -37,-4 38,4
FIDUCIAL-1.5X3 [mil] "FIDUCIAL-1.5X3"
  rrect100% 60x60 smd: 1(0,0)
FTSH-105-01-XXX-DV-K [mil] "FTSH-105-01-XXX-DV-K"
  rect 29x110 smd: 1(-100,-80) 2(-100,80) 3(-50,-80) 4(-50,80) 5(0,-80) 6(0,80) 7(50,-80) 8(50,80) 9(100,-80) 10(100,80)
  silkscreen extent -175,-175 145,150
HEADER_3X01_SMD_H_BOARD_EDGE_SHORT [mil] "HEADER_3X01_SMD_H_BOARD_EDGE_SHORT"
  rect 50x70 smd: 1(-100,0) 2(0,0) 3(100,0)
JST-ZH-SMT-VERTICAL [mil] "JST-ZH-SMT-VERTICAL"
  rect 28x126 smd: P$1(-59.06,-68.9) P$2(0,-68.9) P$3(60,-68.9)
  rect 60x91 smd: P$4(140,4) P$5(-139.76,4)
KYOCERA-KNH16-DA [mil] "KYOCERA-KNH16-DA"
  rect 24x24 smd: P$1(-31.5,0) P$2(32,0)
  rect 16x16 smd: P$3(0,-15.75) P$4(0,16)
  rect 16x16 hole 12: P$5(0,0)
  silkscreen extent -31,-16 32,16
L3G4200DH-MAN [mil] "L3G4200DH-MAN"
  rect 36x16 smd: 1(-74.8,39) 2(-74.8,13) 3(-74.8,-12.8) 4(-74.8,-38.39) 9(75,-38.39) 10(75,-12.8) 11(75,13) 12(75,39)
  rect 16x36 smd: 5(-38.39,-74.8) 6(-12.8,-74.8) 7(13,-74.8) 8(39,-74.8) 13(39,75) 14(13,75) 15(-12.8,75) 16(-38.39,75)
  silkscreen extent -102,-79 79,83
LGA-16L [mil] "LGA-16L"
  rect 26x12 smd: 1(-53.94,40) 2(-53.94,20) 3(-53.94,0) 4(-53.94,-19.68) 5(-53.94,-39.37) 9(54,-39.37) 10(54,-19.68) 11(54,0) 12(54,20) 13(54,40)
  rect 12x26 smd: 6(-19.68,-53.94) 7(0,-53.94) 8(20,-53.94) 14(20,54) 15(0,54) 16(-19.68,54)
  silkscreen extent -74,-65 65,74
MICROSD [mil] "MICROSD"
  rect 32x60 smd: 1(-76.38,107) 2(-33.07,91) 3(11,107) 4(54,115) 5(97,107) 6(141,115) 7(184,107) 8(227,107)
  rect 56x75 smd: NC(-269.69,258) NC3(258,219)
  rect 71x56 smd: NC1(-29.53,-299.21) NC2(195,-299.21)
  silkscreen extent -287,-315 276,256
MICROSMP [mil] "MICROSMP"
  rect 32x32 smd: ANODE(26,0)
  rect 79x44 smd: CATHODE(-49.21,0)
  silkscreen extent -67,-24 24,35
MLF-8-EPAD [mil] "MLF-8-EPAD"
  rect 20x12 smd: 1(-31.5,30)
  rrect40% 20x12 smd: 2(-31.5,10) 3(-31.5,-9.84) 4(-31.5,-29.53) 5(32,-29.53) 6(32,-9.84) 7(32,10) 8(32,30)
  rrect40% 28x56 smd: GND(0,0)
  silkscreen extent -39,-39 40,40
MO-220 [mil] "MO-220"
  rect 28x10 smd: P$1(-74.8,50) P$2(-74.8,30) P$3(-74.8,10) P$4(-74.8,-9.84) P$5(-74.8,-29.53) P$6(-74.8,-49.21) P$13(75,-49.21) P$14(75,-29.53) P$15(75,-9.84) P$16(75,10) P$17(75,30) P$18(75,50)
  rect 10x28 smd: P$7(-49.21,-74.8) P$8(-29.53,-74.8) P$9(-9.84,-74.8) P$10(10,-74.8) P$11(30,-74.8) P$12(50,-74.8) P$19(50,75) P$20(30,75) P$21(10,75) P$22(-9.84,75) P$23(-29.53,75) P$24(-49.21,75)
  rect 97x97 smd: P$25(0,0)
  silkscreen extent -79,-79 79,79
MOLEX-47346-0001 [mil] "MOLEX-47346-0001"
  rect 67x18 smd: D+(111,0) D-(111,26) GND(111,-51.18) ID(111,-25.59) VBUS(111,52)
  rect 75x94 smd: GND1(0,117) GND4(0,-116.14)
  rect 83x59 smd: GND2(91,99) GND3(91,-98.43)
  rect 75x47 smd: GND5(0,-32.97) GND6(0,33)
  silkscreen extent 52,-157 111,158
MOUNT-HOLE3.1 [mil] "MOUNT-HOLE3.1"
  round 162 hole 123: P$1(0,0)
  silkscreen extent -95,-95 95,95
MS621FE [mil] "MS621FE"
  rect 119x30 smd: 1(203,30) 2(203,-29.53)
  silkscreen extent -134,-134 134,134
MS5611-01BA [mil] "MS5611-01BA"
  rect 44x24 smd: 1(-43.31,74) 2(-43.31,25) 3(-43.31,-24.61) 4(-43.31,-73.82) 5(44,-73.82) 6(44,-24.61) 7(44,25) 8(44,74)
  silkscreen extent -69,-108 69,109
OSCILLATOR-3.2X2.5 [mil] "OSCILLATOR-3.2X2.5"
  rect 56x48 smd: 1(-43.31,-33.46) 2(44,-33.46) 3(44,34) 4(-43.31,34)
  silkscreen extent -95,-83 83,71
OSHW-LOGO-S [mil] "OSHW-LOGO-S"
  silkscreen extent -59,-47 59,59
PAD.04X.04 [mil] "PAD.04X.04"
  rrect100% 40x40 smd: P$1(0,0)
  silkscreen extent -26,-26 26,26
PTC-1206 [mil] "PTC-1206"
  rect 40x71 smd: 1(-55.12,0) 2(56,0)
  silkscreen extent -25,-30 25,30
QFN8-DSG [mil] "QFN8-DSG"
  rect 12x20 smd: 1(-29.53,-37.4) 2(-9.84,-37.4) 3(10,-37.4) 4(30,-37.4) 5(30,38) 6(10,38) 7(-9.84,38) 8(-29.53,38)
  rect 63x36 smd: GND(0,0)
  rect 18x18 hole 12: P$2(-15.75,0) P$3(16,0)
  silkscreen extent -61,-39 40,40
QFN20-RGY [mil] "QFN20-RGY"
  rect 12x34 smd: 1(-29.53,89) 10(-29.53,-88.58) 11(30,-88.58) 20(30,89)
  rect 34x12 smd: 2(-68.9,69) 3(-68.9,50) 4(-68.9,30) 5(-68.9,10) 6(-68.9,-9.84) 7(-68.9,-29.53) 8(-68.9,-49.21) 9(-68.9,-68.9) 12(69,-68.9) 13(69,-49.21) 14(69,-29.53) 15(69,-9.84) 16(69,10) 17(69,30) 18(69,50) 19(69,69)
  silkscreen extent -82,-89 69,102
QFN-24 [mil] "QFN-24"
  rect 32x12 smd: 1(-78.74,50) 2(-78.74,30) 3(-78.74,10) 4(-78.74,-9.84) 5(-78.74,-29.53) 6(-78.74,-49.21) 13(79,-49.21) 14(79,-29.53) 15(79,-9.84) 16(79,10) 17(79,30) 18(79,50)
  rect 12x32 smd: 7(-49.21,-78.74) 8(-29.53,-78.74) 9(-9.84,-78.74) 10(10,-78.74) 11(30,-78.74) 12(50,-78.74) 19(50,79) 20(30,79) 21(10,79) 22(-9.84,79) 23(-29.53,79) 24(-49.21,79)
  Top region: -19.68,-19.68 20,-19.68 20,20 -19.68,20
  silkscreen extent -79,-79 79,79
SO08 [mil] "SO08"
  rect 24x87 smd: 1(-75,-103) 2(-25,-103) 3(25,-103) 4(75,-103) 5(75,103) 6(25,103) 7(-25,103) 8(-75,103)
  silkscreen extent -93,-71 93,71
SOD323 [mil] "SOD323"
  rect 32x24 smd: A(50,0) C(-49.21,0)
  silkscreen extent -62,-26 50,26
SON10 [mil] "SON10"
  rect 13x20 smd: 1(-39.37,-54.13) 2(-19.68,-54.13) 3(0,-54.13) 4(20,-54.13) 5(40,-54.13) 6(40,55) 7(20,55) 8(0,55) 9(-19.68,55) 10(-39.37,55)
  silkscreen extent -57,-55 58,56
SOT23-3 [mil] "SOT23-3"
  rect 32x36 smd: 1(-37.4,-39.37) 2(38,-39.37) 3(0,44)
  silkscreen extent -55,-4 56,28
SOT23-8 [mil] "SOT23-8"
  rect 17x52 smd: 1(-38.39,-46.26) 2(-12.8,-46.26) 3(13,-46.26) 4(39,-46.26) 5(39,47) 6(13,47) 7(-12.8,47) 8(-38.39,47)
  silkscreen extent -59,-39 60,40
SOT23-BEC [mil] "SOT23-BEC"
  rect 40x56 smd: B(-37.4,-43.31) C(0,44) E(38,-43.31)
SOT563-6 [mil] "SOT563-6"
  rect 12x18 smd: 1(-19.68,-26.57) 2(0,-26.57) 3(20,-26.57) 4(20,27) 5(0,27) 6(-19.68,27)
  silkscreen extent -31,-24 32,24
TQFP48 [mil] "TQFP48"
  rect 10x40 smd: 1(-108.27,-177.17) 2(-88.58,-177.17) 3(-68.9,-177.17) 4(-49.21,-177.17) 5(-29.53,-177.17) 6(-9.84,-177.17) 7(10,-177.17) 8(30,-177.17) 9(50,-177.17) 10(69,-177.17) 11(89,-177.17) 12(109,-177.17) 25(109,178) 26(89,178) 27(69,178) 28(50,178) 29(30,178) 30(10,178) 31(-9.84,178) 32(-29.53,178) 33(-49.21,178) 34(-68.9,178) 35(-88.58,178) 36(-108.27,178)
  rect 40x10 smd: 13(178,-108.27) 14(178,-88.58) 15(178,-68.9) 16(178,-49.21) 17(178,-29.53) 18(178,-9.84) 19(178,10) 20(178,30) 21(178,50) 22(178,69) 23(178,89) 24(178,109) 37(-177.17,109) 38(-177.17,89) 39(-177.17,69) 40(-177.17,50) 41(-177.17,30) 42(-177.17,10) 43(-177.17,-9.84) 44(-177.17,-29.53) 45(-177.17,-49.21) 46(-177.17,-68.9) 47(-177.17,-88.58) 48(-177.17,-108.27)
  silkscreen extent -133,-133 133,133
TQFP100 [mil] "TQFP100"
  rect 60x12 smd: 1(-314.96,237) 2(-314.96,217) 3(-314.96,197) 4(-314.96,178) 5(-314.96,158) 6(-314.96,138) 7(-314.96,119) 8(-314.96,99) 9(-314.96,79) 10(-314.96,60) 11(-314.96,40) 12(-314.96,20) 13(-314.96,0) 14(-314.96,-19.69) 15(-314.96,-39.37) 16(-314.96,-59.06) 17(-314.96,-78.74) 18(-314.96,-98.43) 19(-314.96,-118.11) 20(-314.96,-137.8) 21(-314.96,-157.48) 22(-314.96,-177.17) 23(-314.96,-196.85) 24(-314.96,-216.54) 25(-314.96,-236.22) 51(315,-236.22) 52(315,-216.54) 53(315,-196.85) 54(315,-177.17) 55(315,-157.48) 56(315,-137.8) 57(315,-118.11) 58(315,-98.43) 59(315,-78.74) 60(315,-59.06) 61(315,-39.37) 62(315,-19.69) 63(315,0) 64(315,20) 65(315,40) 66(315,60) 67(315,79) 68(315,99) 69(315,119) 70(315,138) 71(315,158) 72(315,178) 73(315,197) 74(315,217) 75(315,237)
  rect 12x60 smd: 26(-236.22,-314.96) 27(-216.54,-314.96) 28(-196.85,-314.96) 29(-177.17,-314.96) 30(-157.48,-314.96) 31(-137.8,-314.96) 32(-118.11,-314.96) 33(-98.43,-314.96) 34(-78.74,-314.96) 35(-59.06,-314.96) 36(-39.37,-314.96) 37(-19.69,-314.96) 38(0,-314.96) 39(20,-314.96) 40(40,-314.96) 41(60,-314.96) 42(79,-314.96) 43(99,-314.96) 44(119,-314.96) 45(138,-314.96) 46(158,-314.96) 47(178,-314.96) 48(197,-314.96) 49(217,-314.96) 50(237,-314.96) 76(237,315) 77(217,315) 78(197,315) 79(178,315) 80(158,315) 81(138,315) 82(119,315) 83(99,315) 84(79,315) 85(60,315) 86(40,315) 87(20,315) 88(0,315) 89(-19.69,315) 90(-39.37,315) 91(-59.06,315) 92(-78.74,315) 93(-98.43,315) 94(-118.11,315) 95(-137.8,315) 96(-157.48,315) 97(-177.17,315) 98(-196.85,315) 99(-216.54,315) 100(-236.22,315)
  silkscreen extent -276,-276 276,276
TSSOP8_SOT505-2 [mil] "TSSOP8_SOT505-2"
  rect 14x34 smd: 1(-38.39,-69.88) 2(-12.8,-69.88) 3(13,-69.88) 4(39,-69.88) 5(39,70) 6(13,70) 7(-12.8,70) 8(-38.39,70)
  silkscreen extent -73,-85 58,40

## Part data
!VBUS_VALID !VDD_BRICK_VALID !VDD_SERVO_VALID ADC_PR CAN_H CAN_L FMU-BOOT1101 GND GND. IO-BOOT1101 S1RX S1TX S2RX S2TX S3RX S3TX S4RX S4TX S5_RX S5_TX VBUS VDD_3V1101 VDD_5V_BRICK VDD_5V_IN VDD_SERVO VDDA_3V1101: library part PAD.04X.04
C101 C102 C103 C201 C202 C401 C402 C502 C503 C504 C505 C507 C508 C510 C514 C602 C606 C607 C608 C609 C610 C612 C615 C616 C617 C701 C703 C704 C801 C802 C803 C804 C805 C806 C901 C902 C903 C1002 C1005 C1008 C1105 C1106 C1107 C1108 C1109 C1110: library part 0402-CAP
C501 C506 C509 C511 C601 C604 C605 C1001 C1101 C1102 C1103: library part 0805-CAP
C512 C513 C515 C603 C611 C613 C702 C1003 C1004: library part 0603-CAP
C614 C618 C1104: library part 1206-CAP
D201 D202 D203 D401 D402 D403 D404 D701 D801 D901 D902 D903: library part 0402-TVS
D602: library part SOD323
D904: library part MICROSMP
D1001: library part SOT23-3
F1001: library part PTC-1206
J201 J202 J203 J204 J601: library part DF13C-6P-1.25V
J301: library part MOLEX-47346-0001
J302 J401 J405: library part DF13C-4P-1.25V
J402 J702: library part DF13C-3P-1.25V
J403: library part DF13C-7P-1.25V
J404: library part DF13C-5P-1.25V
J701: library part DF13C-2P-1.25V
J801: library part JST-ZH-SMT-VERTICAL
J901: library part 3X16RA
JP1 JP2: library part FIDUCIAL-1.5X3
JX301 JX802: library part FTSH-105-01-XXX-DV-K
JX801: library part HEADER_3X01_SMD_H_BOARD_EDGE_SHORT
L201 L202 L203 L401 L402 L403 L404 L603 L901 L1101 L1102: library part KYOCERA-KNH16-DA
L701: library part 0805-IND
LED701 LED702 LED703 LED704 LED705: library part 0603-LED
M3_MOUNT1101 M3_MOUNT1102 M3_MOUNT1103 M3_MOUNT1104: library part MOUNT-HOLE3.1
OSHW_LOGO: library part OSHW-LOGO-S
Q601: library part SOT23-BEC
R101 R102 R201 R202 R203 R204 R205 R206 R207 R208 R209 R210 R211 R212 R213 R214 R215 R216 R301 R302 R303 R304 R305 R306 R307 R401 R402 R403 R404 R405 R406 R407 R408 R409 R602 R603 R604 R608 R609 R610 R611 R615 R616 R617 R620 R635 R701 R702 R703 R704 R705 R706 R707 R708 R709 R710 R711 R712 R713 R735 R736 R801 R802 R803 R804 R901 R902 R903 R904 R905 R906 R907 R908 R909 R910 R911 R912 R913 R914 R915 R916 R917 R918 R919 R922 R1001 R1002 R1101 R1102 R1103 R1104 R1105 R1106 R1107 R1109 R1110 R1111 R1112 R1113 R1114 R1115: library part 0402-RES
R621: library part 0603-RES
RN1101: library part EXB28V
S601 S801: library part EVQP7J01K
U101: library part TQFP100
U102: library part SO08
U201 U202 U901 U902: library part QFN20-RGY
U301: library part MICROSD
U302: library part SOT563-6
U401 U702: library part SOT23-8
U501: library part L3G4200DH-MAN
U502 U504: library part LGA-16L
U505: library part QFN-24
U601 U602 U1001: library part QFN8-DSG
U603 U1002: library part MLF-8-EPAD
U701: library part SON10
U703: library part 6-PLCC
U801: library part TQFP48
U903: library part TSSOP8_SOT505-2
U1101: library part MO-220
U1102 U1103 U1104: library part 1206-8
X101 X801: library part OSCILLATOR-3.2X2.5
X503: library part 51281-1094

## Via types
v1: diameter 17.84/17.84/17.84/17.84/17.84/17.84 (per signal layer), hole 8, Top to Bottom, 334 vias
v2: diameter 21.84/21.84/21.84/21.84/21.84/21.84 (per signal layer), hole 12, Top to Bottom, 129 vias
v3: diameter 15.84/15.84/15.84/15.84/15.84/15.84 (per signal layer), hole 6, Top to Bottom, 8 vias
v4: diameter 19.84/19.84/19.84/19.84/19.84/19.84 (per signal layer), hole 10, Top to Bottom, 2 vias

## Nets (pads, with @x,y where several pads share a name; then routed paths per layer and width w, separated by ;. In a path a pad name is that pad's centre, name@x,y a point inside that pad or via, vN(x,y) a via of type N, cw(c..) or ccw(c..) an arc to the next point about the centre after c; other vN are vias at no path point)
!ACCEL_MAG_CS: U101.9 U504.8 X503.6 | length 1961.9
  Top w6: U101.9@2671.4,1700.37 2702.4,1731.37 v1(2705.4,1731.37) ; v1(3653.4,1423.37) 3653.4,1219.37 3675.4,1198.37 X503.6@3675.4,1131.37 ; v1(3949.4,1395.37) 3961.4,1383.37 3961.4,1327.37 3973.4,1315.37 3981.4,1315.37 3990.4,1307.37 3990.4,1289.37 U504.8@3990.4,1291.37
  Horizontal w6: v1(2705.4,1731.37) 2705.4,1699.37 2769.4,1635.37 2777.4,1635.37 2793.4,1651.37 2849.4,1651.37 3005.4,1495.37 3069.4,1495.37 3121.4,1443.37 3557.4,1443.37 3569.4,1431.37 3645.4,1431.37 v1(3653.4,1423.37) 3701.4,1423.37 3709.4,1431.37 3733.4,1431.37 v3(3757.4,1407.37)
  Vertical w6: v3(3757.4,1407.37) 3805.4,1359.37 3873.4,1359.37 3889.4,1343.37 3917.4,1343.37 3929.4,1355.37 3929.4,1387.37 3937.4,1395.37 v1(3949.4,1395.37)
!BARO_CS: U101.88 U506.5 | length 1852.9
  Top w6: U101.88@2727.4,2090.37 2753.4,2063.37 2753.4,1883.37 v1(2737.4,1867.37) ; v3(3909.4,1367.37) 3921.4,1356.37 U506.5@3936.4,1356.37
  Horizontal w6: v1(2737.4,1867.37) 2777.4,1827.37 3201.4,1827.37 3253.4,1775.37 3829.4,1775.37 3885.4,1719.37 v1(3885.4,1639.37)
  Vertical w6: v1(3885.4,1639.37) 3909.4,1619.37 3909.4,1511.37 3921.4,1499.37 3921.4,1487.37 3909.4,1471.37 v3(3909.4,1367.37)
!FMU-LED_AMBER: R707.P$1 U101.43 | length 1914.6
  Top w6: v1(2089.4,2275.37) 2173.4,2275.37 2193.4,2295.37 2193.4,2315.37 2129.4,2379.37 2129.4,2547.37 2153.4,2571.37 R707.P$1@2153.4,2631.37 ; v1(3205.4,1751.37) U101.43@3242.4,1714.37
  Horizontal w6: v1(2089.4,2275.37) 2101.4,2275.37 2365.4,2011.37 2457.4,2011.37 2481.4,1987.37 2481.4,1967.37 2509.4,1939.37 2525.4,1939.37 2549.4,1915.37 2549.4,1859.37 2625.4,1783.37 3173.4,1783.37 v1(3205.4,1751.37)
!FRAM_CS: U101.57 U102.1 | length 531.6
  Top w6: U101.57@3256.4,2007.37 3305.4,2056.37 3305.4,2147.37 3405.4,2247.37 3405.4,2351.37 3417.4,2363.37 3461.4,2363.37 3480.4,2344.37 U102.1@3480.4,2306.37
!GYRO_CS: U101.7 U501.5 U502.5 X503.7 | length 2068
  Top w6: U101.7@2643.4,1728.37 2730.4,1815.37 v1(2733.4,1815.37) ; v1(3653.4,1191.37) 3655.4,1190.37 X503.7@3655.4,1131.37 ; v1(3685.4,1491.37) 3685.4,1487.37 3710.4,1463.37 U502.5@3710.4,1445.37 ; v1(3877.4,1603.37) 3900.4,1626.37 U501.5@3923.4,1626.37
  Horizontal w6: v1(2733.4,1815.37) 3193.4,1815.37 3245.4,1763.37 3673.4,1763.37 3705.4,1731.37 v1(3705.4,1575.37) 3849.4,1575.37 v1(3877.4,1603.37)
  Vertical w6: v1(3653.4,1191.37) 3653.4,1395.37 3633.4,1415.37 3633.4,1439.37 v1(3685.4,1491.37) 3685.4,1519.37 3705.4,1539.37 v1(3705.4,1575.37)
!IO-LED_AMBER: R709.P$1 U801.28 | length 333.6
  Top w6: v1(2309.4,1383.37) 2309.4,1355.37 2333.4,1331.37 2333.4,1319.37 R709.P$1@2357.4,1295.37 ; v1(2365.4,1535.37) 2365.4,1534.37 U801.28@2400.4,1499.37
  Bottom w6: v1(2309.4,1383.37) 2309.4,1427.37 2365.4,1483.37 v1(2365.4,1535.37)
!IO-LED_BLUE: R712.P$1 U801.27 | length 88.2
  Top w6: U801.27@2386.4,1486.37 2405.4,1466.37 2405.4,1427.37 2401.4,1423.37 R712.P$1@2401.4,1407.37
!IO-LED_SAFETY: R710.P$2 U801.26 | length 117
  Top w6: R710.P$2@2357.4,1375.37 2357.4,1403.37 2389.4,1435.37 2389.4,1454.37 U801.26@2372.4,1472.37
!MPU_CS: U101.17 U505.8 | length 1945.6
  Top w6: U101.17@2782.4,1589.37 2783.4,1589.37 2809.4,1615.37 2809.4,1623.37 2817.4,1631.37 v1(2817.4,1687.37) ; v1(3801.4,1863.37) 3817.4,1879.37 3929.4,1879.37 3936.4,1873.37 U505.8@3955.4,1873.37
  Horizontal w6: v1(2817.4,1687.37) 2817.4,1699.37 2837.4,1719.37 3081.4,1719.37 3093.4,1727.37 v1(3093.4,1751.37) ; v1(3065.4,2091.37) 3109.4,2135.37 3617.4,2135.37 3625.4,2127.37 3625.4,2043.37 3617.4,2035.37 3617.4,2003.37 v1(3641.4,1979.37)
  Vertical w6: v1(3065.4,2091.37) 3093.4,2063.37 v1(3093.4,1751.37) ; v1(3641.4,1979.37) 3649.4,1971.37 3649.4,1895.37 3681.4,1863.37 v1(3801.4,1863.37)
!SBUS_OUTPUT_EN: U801.40 U903.7 | length 1309.8
  Top w6: U903.7@1963.4,1164.37 1942.4,1164.37 1933.4,1155.37 1933.4,1103.37 1941.4,1095.37 1993.4,1095.37 2045.4,1147.37 2045.4,1171.37 2061.4,1187.37 2121.4,1187.37 2133.4,1199.37 v1(2133.4,1223.37) ; U801.40@2470.4,1750.37 2417.4,1698.37 2417.4,1683.37 v1(2473.4,1627.37)
  Horizontal w6: v1(2133.4,1223.37) 2133.4,1191.37 2165.4,1155.37 2321.4,1155.37 2349.4,1183.37 2349.4,1419.37 2473.4,1543.37 v1(2473.4,1627.37)
!SPI_EXT_NSS: J403.5 U101.3 | length 1580.4
  Top w6: U101.3@2588.4,1784.37 2641.4,1838.37 v1(2641.4,1851.37)
  Horizontal w6: v1(2857.4,2395.37) 3101.4,2395.37 3153.4,2343.37 v1(3521.4,2343.37)
  Vertical w6: v1(2641.4,1851.37) 2641.4,1863.37 2781.4,2003.37 2781.4,2319.37 v1(2857.4,2395.37)
  Bottom w6: v1(3521.4,2343.37) 3535.4,2330.37 3564.4,2330.37 3569.4,2335.37 3585.4,2335.37 3593.4,2327.37 3679.4,2327.37 J403.5@3682.4,2330.37
!VBUS_VALID: !VBUS_VALID.P$1 RN1101.2 U101.15 U1101.P$9 | length 1904.9
  Top w6: U101.15@2755.4,1617.37 2797.4,1659.37 v1(2797.4,1707.37) ; RN1101.2@3703.4,2178.37 3727.4,2178.37 v1(3729.4,2175.37) ; v1(3837.4,2275.37) 3841.4,2279.37 3853.4,2279.37 3872.4,2298.37 U1101.P$9@3872.4,2321.37
  Horizontal w6: v1(2797.4,1707.37) 2797.4,1715.37 2845.4,1763.37 3057.4,1763.37 v1(3069.4,1751.37) ; v1(3021.4,2091.37) 3045.4,2067.37 3069.4,2067.37 3125.4,2123.37 3497.4,2123.37 v1(3541.4,2079.37)
  Vertical w6: v1(3021.4,2091.37) 3069.4,2043.37 v1(3069.4,1751.37) ; v1(3541.4,2079.37) 3597.4,2079.37 3617.4,2099.37 3617.4,2167.37 3625.4,2175.37 v1(3729.4,2175.37) 3821.4,2175.37 3837.4,2191.37 v1(3837.4,2275.37)
!VDD_5V_HIPOWER_OC: R602.P$1 U101.41 U601.4 | length 1021.7
  Top w6: U601.4@2959.4,2482.37 2959.4,2437.37 v1(2957.4,2435.37) 2957.4,2411.37 3000.4,2369.37 R602.P$1@3035.4,2369.37 ; v1(3165.4,1735.37) U101.41@3214.4,1687.37
  Vertical w6: v1(2957.4,2435.37) 2957.4,2411.37 3037.4,2331.37 3037.4,2207.37 3165.4,2079.37 v1(3165.4,1735.37)
!VDD_5V_PERIPH_EN: R615.P$1 U101.67 U601.5 U602.5 | length 1335.9
  Top w6: U601.5@2959.4,2557.37 2985.4,2530.37 v1(2985.4,2435.37) ; U101.67@3117.4,2146.37 3149.4,2179.37 v1(3149.4,2183.37) ; R615.P$1@3825.4,2155.37 v1(3849.4,2155.37) 3852.4,2153.37 U602.5@3872.4,2153.37
  Horizontal w6: v1(3149.4,2183.37) 3185.4,2147.37 3417.4,2147.37 3453.4,2183.37 3605.4,2183.37 3613.4,2175.37 3649.4,2175.37 3709.4,2115.37 3749.4,2115.37 3765.4,2131.37 3825.4,2131.37 v1(3849.4,2155.37) 3841.4,2147.37
  Vertical w6: v1(2985.4,2435.37) 2985.4,2403.37 3049.4,2339.37 3049.4,2283.37 v1(3149.4,2183.37)
!VDD_5V_PERIPH_OC: R604.P$1 U101.46 U602.4 | length 1678.3
  Top w6: v1(3265.4,1843.37) 3257.4,1835.37 3257.4,1782.37 U101.46@3284.4,1756.37 ; v1(3653.4,2051.37) 3693.4,2091.37 R604.P$1@3693.4,2123.37 ; U602.4@3947.4,2153.37 3947.4,2169.37 v1(3949.4,2171.37)
  Horizontal w6: v1(3293.4,2179.37) 3417.4,2179.37 3445.4,2207.37 3601.4,2207.37 3621.4,2187.37 3665.4,2187.37 3709.4,2143.37 3753.4,2143.37 3781.4,2171.37 3833.4,2171.37 3837.4,2175.37 3861.4,2175.37 3865.4,2171.37 v1(3949.4,2171.37) 3945.4,2167.37 3945.4,2095.37 3901.4,2051.37 v1(3653.4,2051.37)
  Vertical w6: v1(3265.4,1843.37) 3253.4,1851.37 3253.4,1879.37 3265.4,1891.37 3265.4,2083.37 3249.4,2099.37 3249.4,2135.37 v1(3293.4,2179.37)
!VDD_BRICK_VALID: !VDD_BRICK_VALID.P$1 RN1101.4 U101.91 U1101.P$7 | length 2238.9
  Top w6: v1(2645.4,2083.37) 2650.4,2083.37 U101.91@2685.4,2048.37 ; v1(3529.4,2031.37) 3529.4,2047.37 3509.4,2067.37 3509.4,2091.37 3529.4,2111.37 !VDD_BRICK_VALID.P$1@3529.4,2159.37 ; RN1101.4@3703.4,2222.37 3724.4,2222.37 v1(3733.4,2231.37) ; v1(3801.4,2311.37) 3811.4,2321.37 U1101.P$7@3832.4,2321.37
  Horizontal w6: v1(2673.4,2347.37) 2753.4,2347.37 2765.4,2335.37 2949.4,2335.37 2989.4,2295.37 3557.4,2295.37 3565.4,2287.37 3585.4,2287.37 3593.4,2295.37 3785.4,2295.37 v1(3801.4,2311.37)
  Vertical w6: v1(2645.4,2083.37) 2673.4,2111.37 v1(2673.4,2347.37) ; v1(3529.4,2031.37) 3529.4,2051.37 3513.4,2067.37 3513.4,2091.37 3529.4,2107.37 3529.4,2215.37 3565.4,2251.37 3713.4,2251.37 v1(3733.4,2231.37) 3733.4,2243.37 v1(3801.4,2311.37)
!VDD_SERVO_VALID: !VDD_SERVO_VALID.P$1 RN1101.3 U101.93 U1101.P$8 | length 2177
  Top w6: U101.93@2657.4,2021.37 2681.4,1996.37 v1(2681.4,1979.37) ; v1(3573.4,2103.37) 3585.4,2115.37 !VDD_SERVO_VALID.P$1@3585.4,2163.37 ; RN1101.3@3703.4,2197.37 3727.4,2197.37 v1(3737.4,2207.37) ; v1(3817.4,2291.37) 3821.4,2295.37 3845.4,2295.37 3852.4,2302.37 U1101.P$8@3852.4,2321.37
  Horizontal w6: v1(2693.4,2327.37) 2753.4,2327.37 2757.4,2323.37 2881.4,2323.37 2921.4,2283.37 3549.4,2283.37 3561.4,2271.37 3589.4,2271.37 3601.4,2283.37 3793.4,2283.37 3801.4,2291.37 v1(3817.4,2291.37)
  Vertical w6: v1(2681.4,1979.37) 2693.4,1991.37 v1(2693.4,2327.37) ; v1(3573.4,2103.37) 3545.4,2131.37 3545.4,2195.37 3557.4,2207.37 v1(3737.4,2207.37) 3749.4,2207.37 3757.4,2215.37 3809.4,2215.37 3817.4,2223.37 v1(3817.4,2291.37)
ACCEL_DRDY: U101.90 U504.11 X503.3 | length 2170
  Top w6: U101.90@2699.4,2062.37 2729.4,2031.37 2729.4,1911.37 2701.4,1883.37 v1(2701.4,1815.37) ; v1(3733.4,1195.37) 3733.4,1132.37 X503.3@3734.4,1131.37 ; v1(3925.4,1243.37) 3933.4,1235.37 U504.11@3956.4,1235.37
  Horizontal w6: v1(2733.4,1339.37) 2869.4,1339.37 2981.4,1227.37 3173.4,1227.37 3181.4,1227.37 3305.4,1227.37 3373.4,1159.37 3697.4,1159.37 v1(3733.4,1195.37) 3781.4,1243.37 v1(3925.4,1243.37)
  Vertical w6: v1(2701.4,1815.37) 2745.4,1771.37 2745.4,1351.37 v1(2733.4,1339.37)
ALARM: R701.P$2 U101.77 | length 1595.9
  Top w6: R701.P$2@1794.4,2203.37 1794.4,2199.37 v1(1813.4,2179.37) ; U101.77@2880.4,2243.37 2916.4,2207.37 v1(2957.4,2207.37)
  Horizontal w6: v1(1813.4,2179.37) 1813.4,2403.37 1841.4,2431.37 2041.4,2431.37 2113.4,2359.37 2573.4,2359.37 2725.4,2207.37 v1(2957.4,2207.37)
BATT_CURRENT_SENS: R1101.P$1 U101.26 | length 1703.1
  Top w6: U101.26@3005.4,1478.37 3021.4,1461.37 v1(3021.4,1439.37) ; v1(3769.4,2195.37) 3773.4,2199.37 R1101.P$1@3786.4,2199.37
  Horizontal w6: v1(2977.4,2179.37) 3001.4,2203.37 3421.4,2203.37 3441.4,2223.37 3605.4,2223.37 3629.4,2199.37 3673.4,2199.37 3717.4,2155.37 3745.4,2155.37 3753.4,2163.37 3753.4,2179.37 v1(3769.4,2195.37)
  Vertical w6: v1(2977.4,2179.37) 2993.4,2163.37 2993.4,2035.37 2973.4,2015.37 2973.4,1527.37 3021.4,1479.37 v1(3021.4,1439.37)
BATT_CURRENT_SENS_PROT: J601.3 L1101.P$1 R1104.P$1 | length 490.1
  Top w6: L1101.P$1@3925.4,2199.37 v1(3949.4,2199.37) ; v1(3989.4,2135.37) R1104.P$1@4018.4,2135.37
  Vertical w6: v1(3949.4,2199.37) 3989.4,2159.37 v1(3989.4,2135.37)
  Bottom w6: v1(3949.4,2199.37) 4005.4,2199.37 4049.4,2243.37 4049.4,2411.37 4033.4,2428.37 J601.3@3986.4,2428.37
BATT_VOLTAGE_SENS: R1102.P$1 U101.25 | length 1717.2
  Top w6: U101.25@2894.4,1478.37 2908.4,1491.37 v1(2933.4,1491.37) ; v1(3765.4,2243.37) R1102.P$1@3786.4,2243.37
  Horizontal w6: v1(2929.4,2259.37) 2937.4,2267.37 3545.4,2267.37 3553.4,2259.37 3597.4,2259.37 3605.4,2267.37 3741.4,2267.37 v1(3765.4,2243.37)
  Vertical w6: v1(2929.4,2259.37) 2929.4,2143.37 2897.4,2111.37 2897.4,1527.37 v1(2933.4,1491.37)
BATT_VOLTAGE_SENS_PROT: J601.4 L1102.P$1 R1103.P$1 | length 503.7
  Top w6: L1102.P$1@3925.4,2255.37 3941.4,2239.37 v1(3949.4,2239.37) ; v1(3989.4,2091.37) R1103.P$1@4018.4,2091.37
  Vertical w6: v1(3949.4,2239.37) 4009.4,2179.37 4009.4,2111.37 v1(3989.4,2091.37)
  Bottom w6: v1(3949.4,2239.37) 4025.4,2239.37 4037.4,2251.37 4037.4,2363.37 4022.4,2379.37 J601.4@3986.4,2379.37
CAN1_RX: U101.81 U401.4 | length 1225.1
  Top w6: U101.81@2824.4,2188.37 2868.4,2143.37 v1(2869.4,2143.37) ; U401.4@3068.4,1181.37 3087.4,1181.37 v1(3105.4,1199.37)
  Horizontal w6: v1(2949.4,1227.37) 2977.4,1199.37 v1(3105.4,1199.37)
  Vertical w6: v1(2869.4,2143.37) 2885.4,2127.37 2885.4,1291.37 v1(2949.4,1227.37)
CAN1_TX: U101.82 U401.1 | length 1081.7
  Top w6: U101.82@2810.4,2174.37 v1(2841.4,2143.37) ; v1(2949.4,1199.37) 2968.4,1181.37 U401.1@2991.4,1181.37
  Vertical w6: v1(2841.4,2143.37) 2873.4,2111.37 2873.4,1275.37 v1(2949.4,1199.37)
CAN2_RX: R216.P$1 U101.51 | length 71
  Top w6: U101.51@3339.4,1923.37 3380.4,1964.37 R216.P$1@3393.4,1964.37
CAN2_TX: R215.P$1 U101.92 | length 76.6
  Top w6: R215.P$1@2609.4,2071.37 2621.4,2071.37 2629.4,2063.37 2642.4,2063.37 U101.92@2671.4,2035.37
CAN_H: CAN_H.P$1 J405.2 R409.P$1 U401.7 | length 225.9
  Top w6: R409.P$1@3002.4,1359.37 3002.4,1332.37 v1(3001.4,1331.37) 3001.4,1319.37 3017.4,1304.37 U401.7@3017.4,1274.37
  Bottom w6: CAN_H.P$1@3001.4,1299.37 v1(3001.4,1331.37) 3017.4,1347.37 3037.4,1347.37 3053.4,1332.37 J405.2@3090.4,1332.37
CAN_L: CAN_L.P$1 J405.3 R409.P$2 U401.6 | length 248.9
  Top w6: R409.P$2@3041.4,1359.37 3041.4,1335.37 v1(3029.4,1323.37) 3042.4,1311.37 U401.6@3042.4,1274.37
  Bottom w6: CAN_L.P$1@2997.4,1243.37 3037.4,1283.37 ; v1(3029.4,1323.37) 3037.4,1316.37 3037.4,1283.37 ; J405.3@3090.4,1283.37 3037.4,1283.37
FMU-!RESET: C609.P$2 R635.P$1 S601.A1 U101.14 U603.3 U701.4 | length 2224.6
  Top w6: S601.A1@2524.4,2559.37 2581.4,2559.37 2581.4,2568.37 2601.4,2548.37 v1(2601.4,2511.37) ; U101.14@2741.4,1631.37 v1(2773.4,1663.37) ; v1(3377.4,1683.37) 3377.4,1713.37 U701.4@3378.4,1714.37 ; v1(3505.4,1615.37) 3505.4,1599.37 3513.4,1591.37 3537.4,1591.37 R635.P$1@3537.4,1587.37 ; v1(3621.4,1615.37) 3635.4,1630.37 U603.3@3650.4,1630.37
  Horizontal w6: v1(2529.4,1907.37) 2529.4,1859.37 2649.4,1739.37 2685.4,1739.37 2697.4,1751.37 2721.4,1751.37 2733.4,1739.37 2733.4,1703.37 v1(2773.4,1663.37) 3357.4,1663.37 v1(3377.4,1683.37) 3381.4,1687.37 3433.4,1687.37 v1(3505.4,1615.37) v1(3621.4,1615.37)
  Vertical w6: v1(2529.4,1907.37) 2601.4,1979.37 v1(2601.4,2511.37)
FMU-BOOT0: FMU-BOOT1101.P$1 R611.P$2 U101.94 | length 222.9
  Top w6: v1(2517.4,2091.37) 2525.4,2084.37 R611.P$2@2525.4,2043.37 2606.4,2043.37 U101.94@2643.4,2007.37
  Bottom w6: FMU-BOOT1101.P$1@2485.4,2107.37 2501.4,2091.37 v1(2517.4,2091.37)
FMU-CH1: U101.45 U901.7 | length 1717.6
  Top w6: U901.7@2042.4,2521.37 2088.4,2521.37 2117.4,2491.37 2117.4,2363.37 v1(2173.4,2307.37) ; v1(3245.4,1899.37) 3245.4,1766.37 U101.45@3270.4,1742.37
  Horizontal w6: v1(2173.4,2307.37) 2173.4,2283.37 2393.4,2063.37 2689.4,2063.37 2845.4,1907.37 3237.4,1907.37 v1(3245.4,1899.37)
FMU-CH1-PROT: J901.46 R913.P$2 | length 118
  Top w16: J901.46@1693.4,2628.37 1734.4,2587.37 R913.P$2@1794.4,2587.37
FMU-CH2: U101.44 U901.6 | length 1691.5
  Top w6: U901.6@2042.4,2501.37 2080.4,2501.37 2105.4,2475.37 2105.4,2347.37 v1(2145.4,2307.37) ; v1(3225.4,1883.37) 3225.4,1759.37 U101.44@3256.4,1728.37
  Horizontal w6: v1(2145.4,2307.37) 2145.4,2291.37 2385.4,2051.37 2681.4,2051.37 2837.4,1895.37 3213.4,1895.37 v1(3225.4,1883.37)
FMU-CH3: U101.42 U901.5 | length 1660.2
  Top w6: U901.5@2042.4,2482.37 2071.4,2482.37 2093.4,2459.37 2093.4,2331.37 v1(2117.4,2307.37) ; v1(3185.4,1863.37) 3185.4,1743.37 U101.42@3228.4,1700.37
  Horizontal w6: v1(2117.4,2307.37) 2117.4,2299.37 2377.4,2039.37 2673.4,2039.37 2829.4,1883.37 3165.4,1883.37 v1(3185.4,1863.37)
FMU-CH4: U101.40 U901.4 | length 1644.2
  Top w6: U901.4@2042.4,2462.37 2071.4,2462.37 2081.4,2451.37 2081.4,2315.37 v1(2089.4,2307.37) ; v1(3145.4,1863.37) 3145.4,1727.37 U101.40@3200.4,1673.37
  Horizontal w6: v1(2089.4,2307.37) 2373.4,2023.37 2669.4,2023.37 2829.4,1863.37 v1(3145.4,1863.37)
FMU-CH5: U101.60 U901.3 | length 1450.7
  Top w6: U901.3@2042.4,2442.37 2063.4,2442.37 2069.4,2435.37 2069.4,2335.37 v1(2061.4,2327.37) ; v1(3121.4,2023.37) 3189.4,2023.37 U101.60@3214.4,2048.37
  Horizontal w6: v1(2061.4,2327.37) 2069.4,2335.37 2557.4,2335.37 2885.4,2007.37 3105.4,2007.37 v1(3121.4,2023.37)
FMU-CH6: U101.61 U901.1 | length 1380.8
  Top w6: U901.1@2003.4,2403.37 2042.4,2363.37 v1(2045.4,2363.37) ; v1(3137.4,2043.37) 3145.4,2035.37 3173.4,2035.37 U101.61@3200.4,2062.37
  Horizontal w6: v1(2045.4,2363.37) 2061.4,2347.37 2565.4,2347.37 2893.4,2019.37 3085.4,2019.37 3109.4,2043.37 v1(3137.4,2043.37)